# Altium PCB RTC_Breakout_SP24.PcbDoc
Units mil, origin at the board's own origin, x right, y up, seen from the top; angles counter-clockwise.
Board outline 5000 x 6250 mil, 6 copper layers (SIG TOP, GND2, PWR3, SIG4, GND5, SIG BOT), stack 60.566 mil thick; 106 components, 79 nets, 469 pads, 176 vias.
Unrouted connection lines stored in the file: 55.
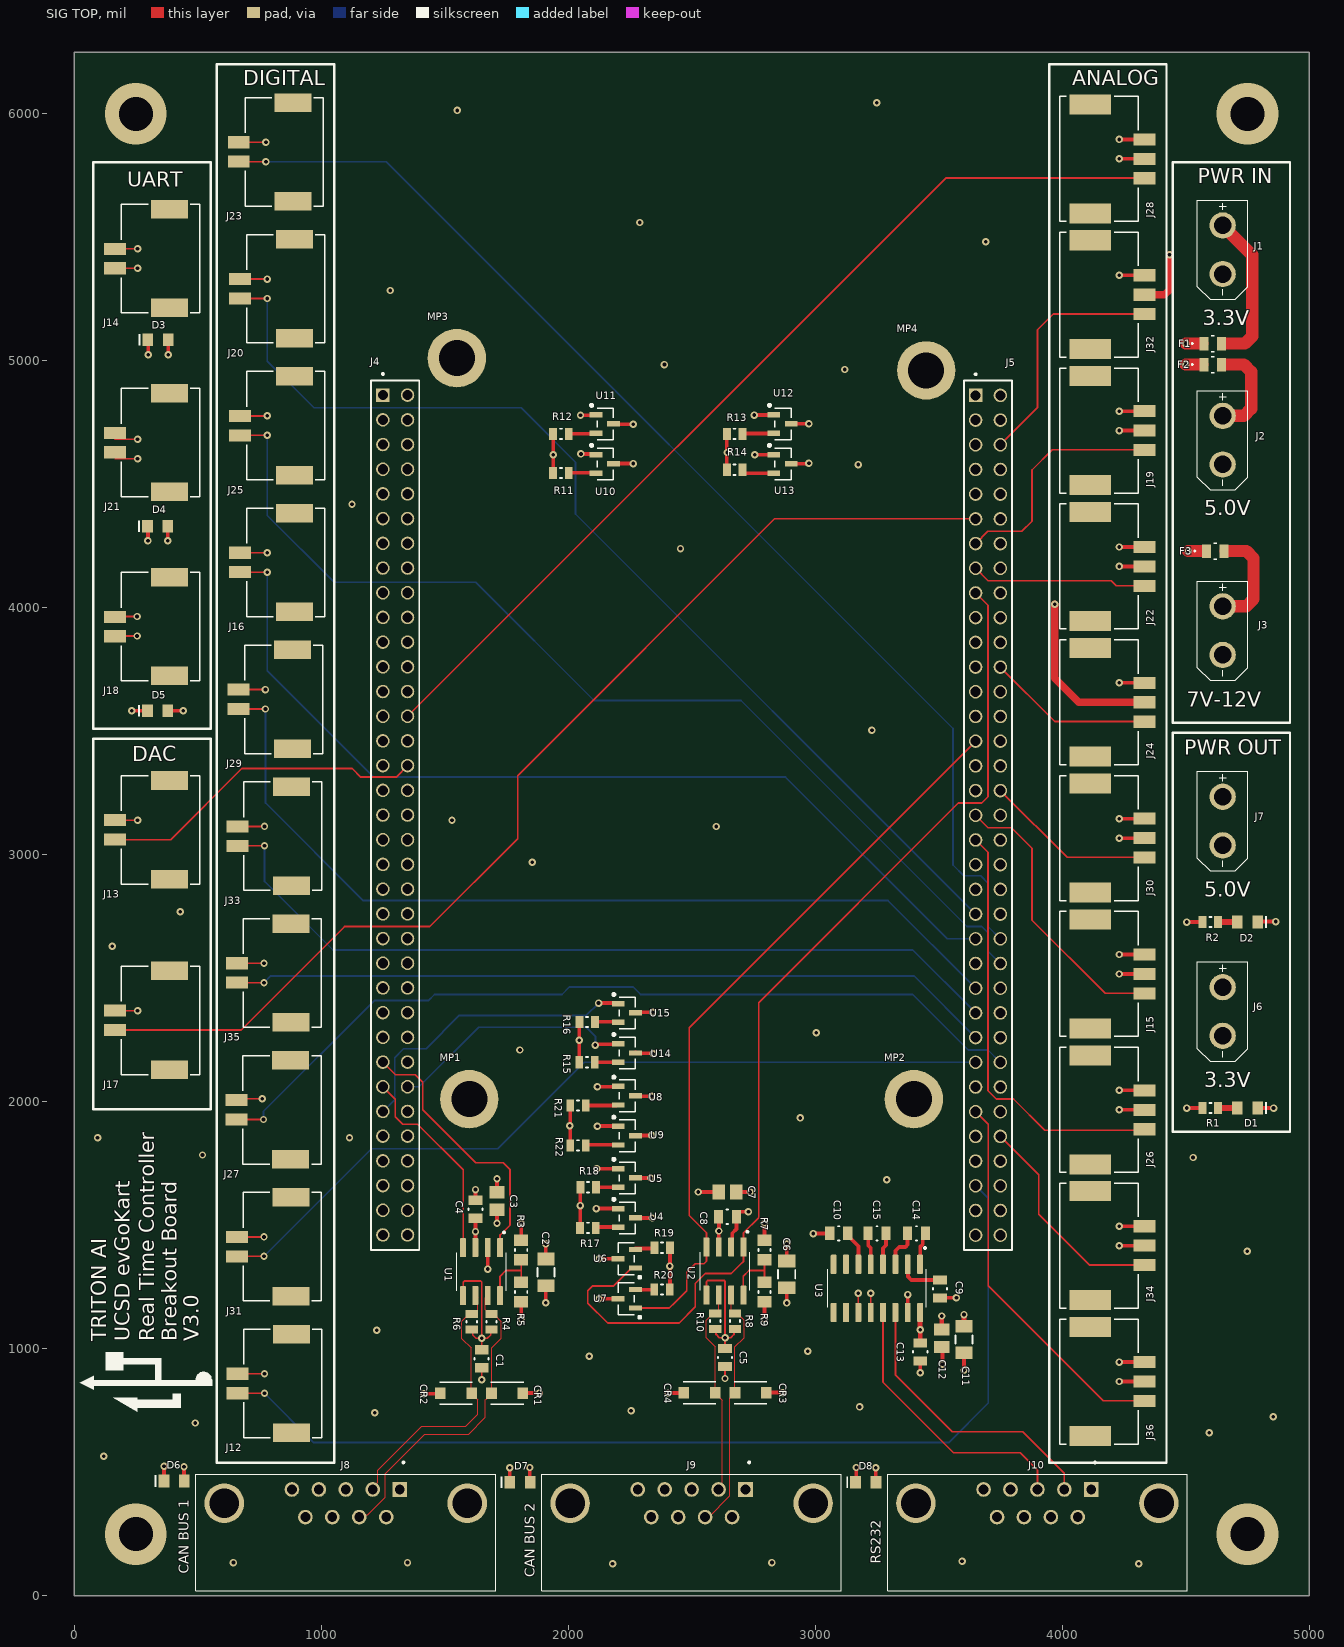
[diagram p0: SIG TOP view]
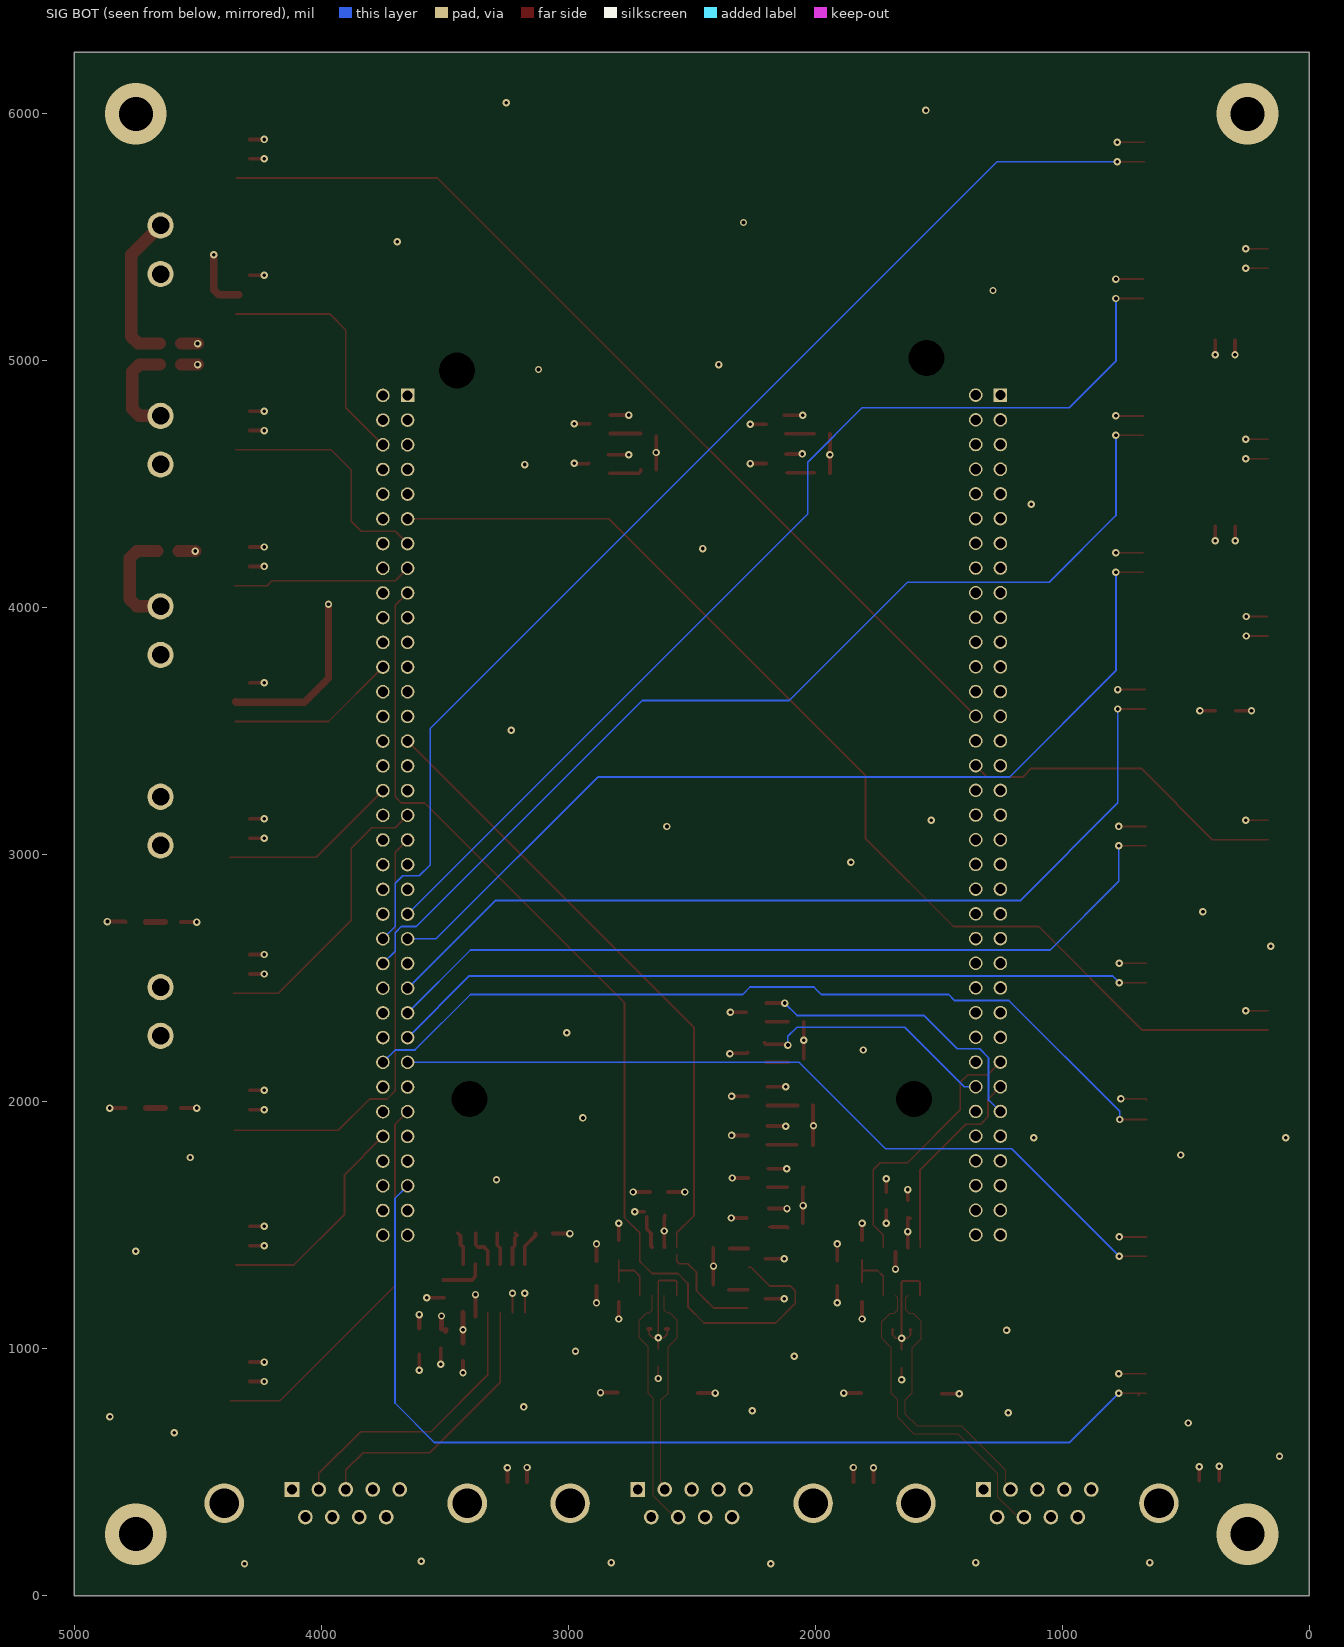
[diagram p1: SIG BOT view, seen from below]
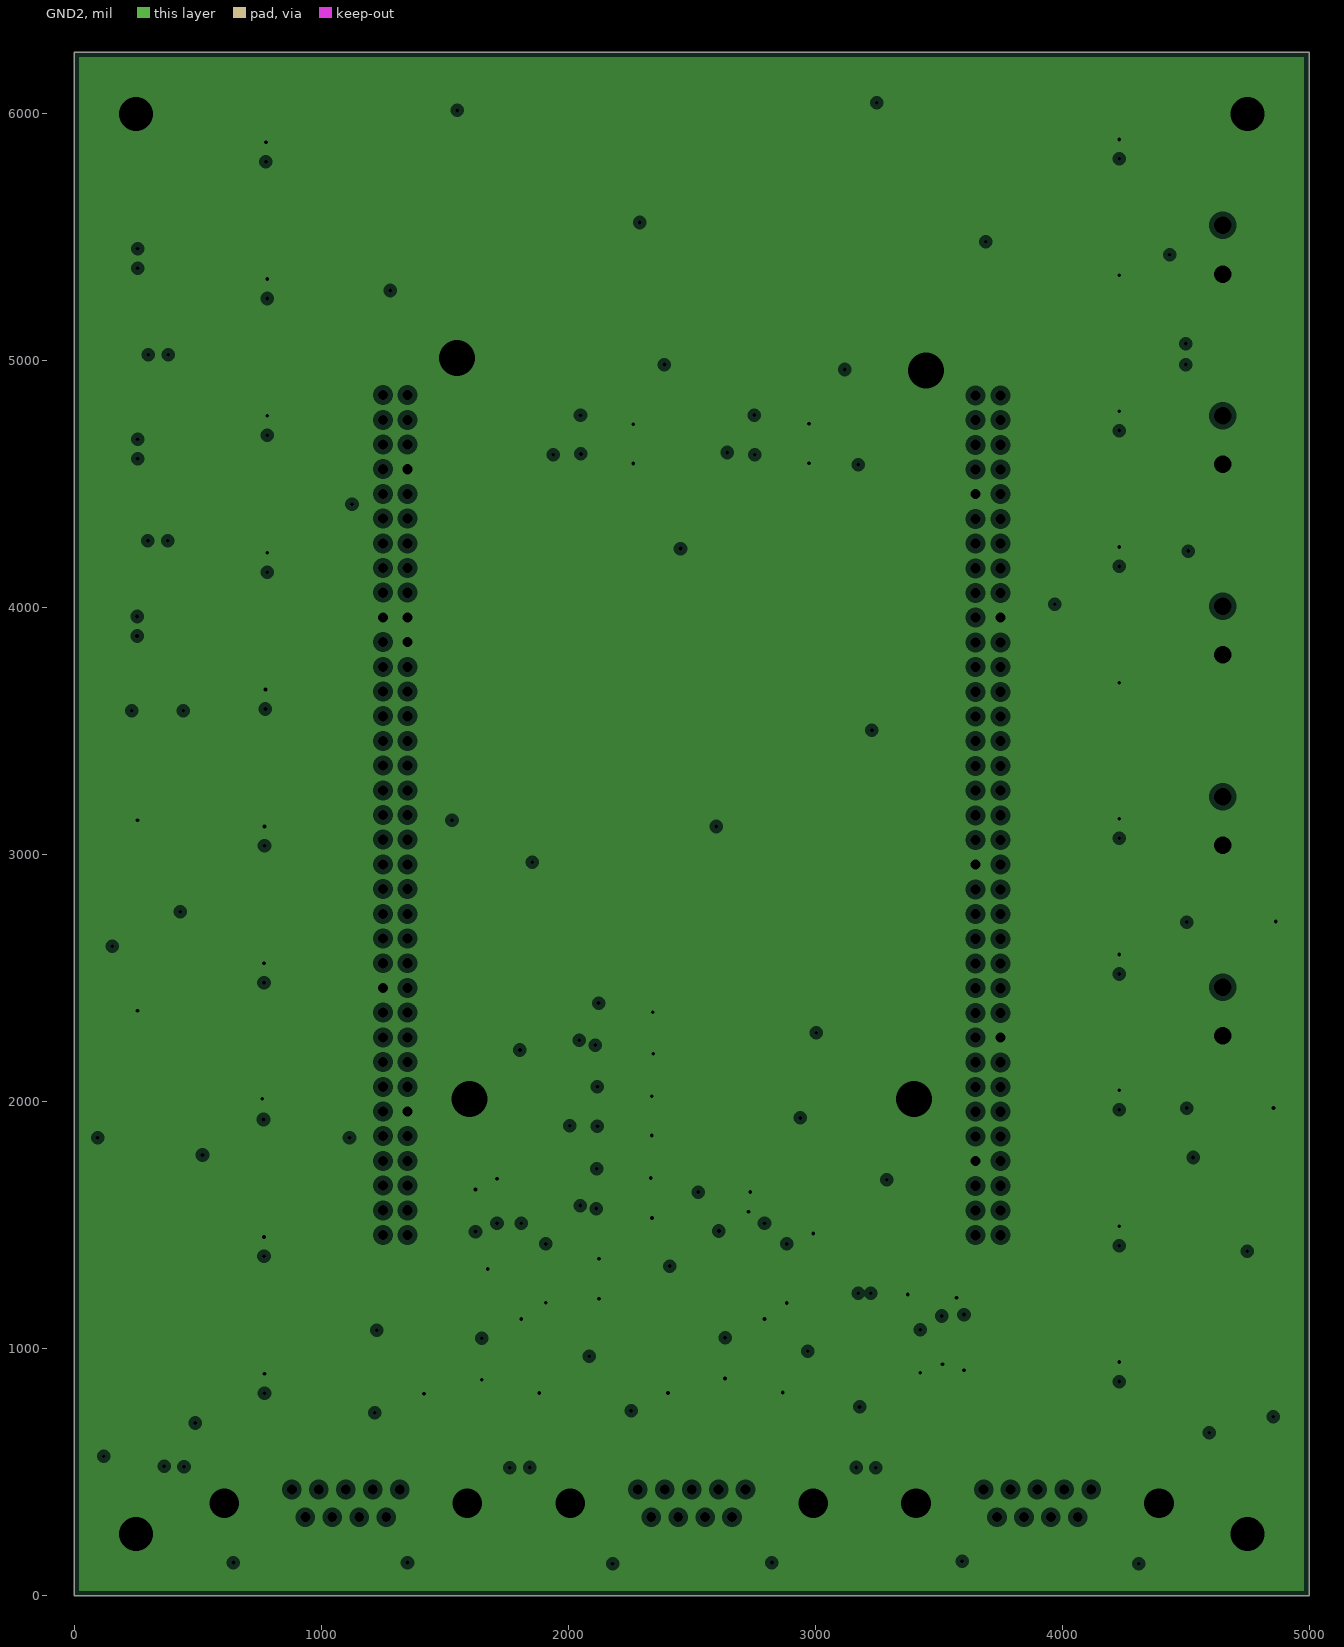
[diagram p2: GND2, clearances drawn from the general rule]
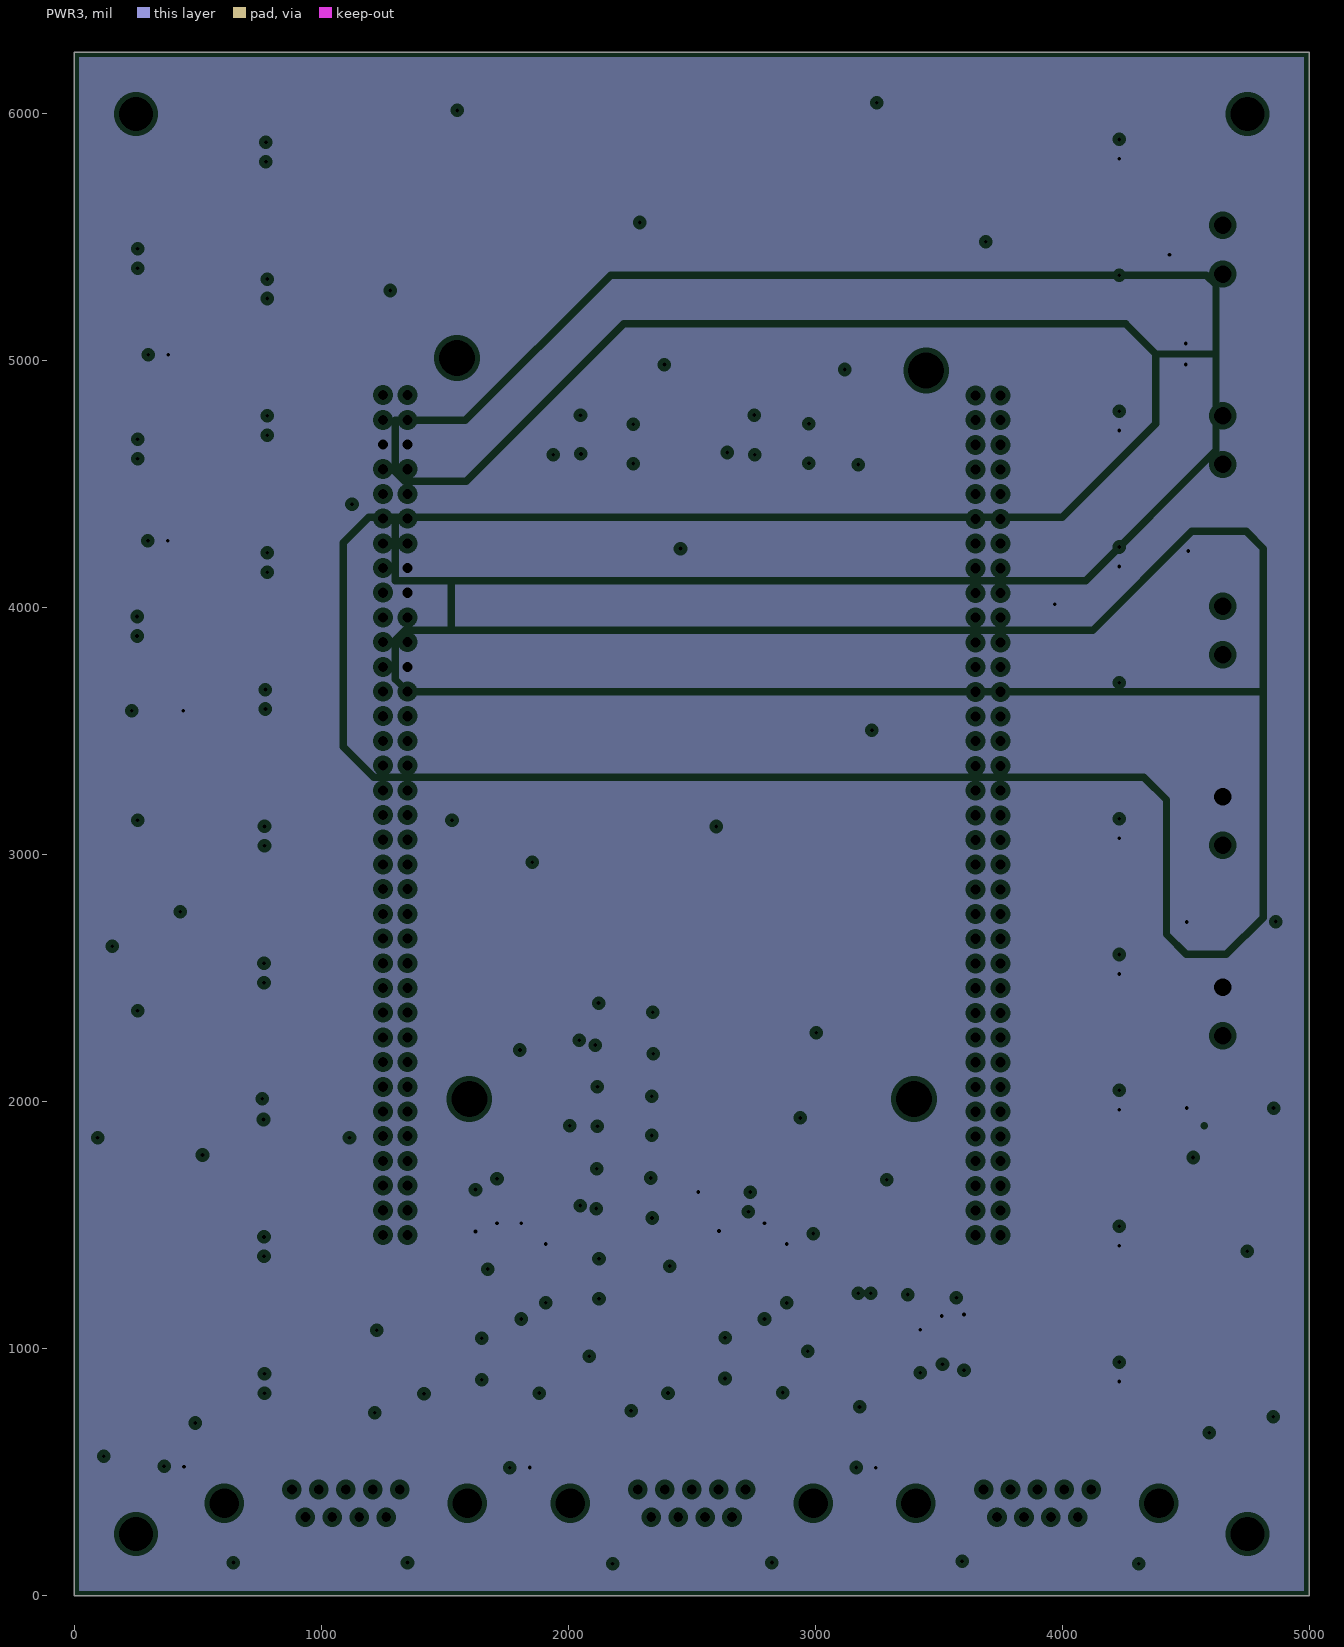
[diagram p3: PWR3, clearances drawn from the general rule]
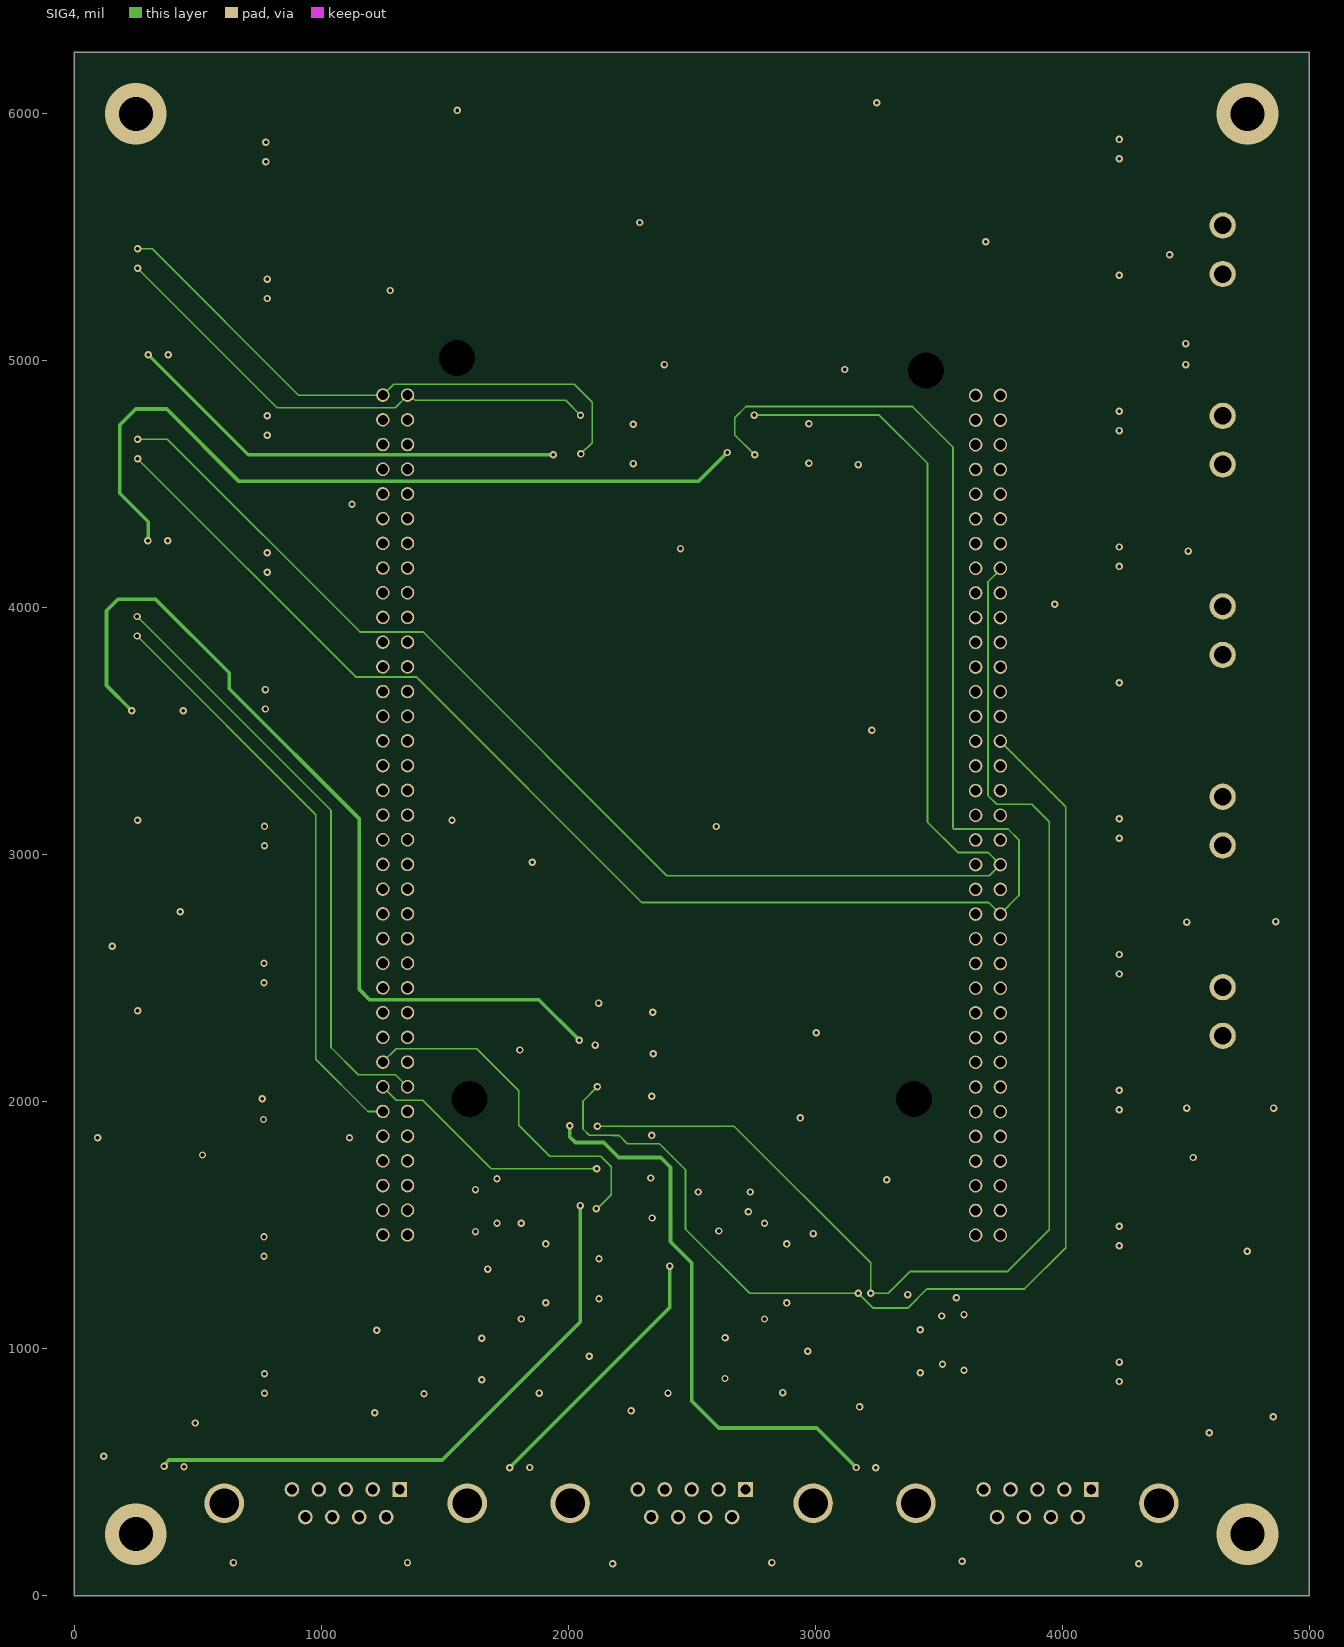
[diagram p4: SIG4]
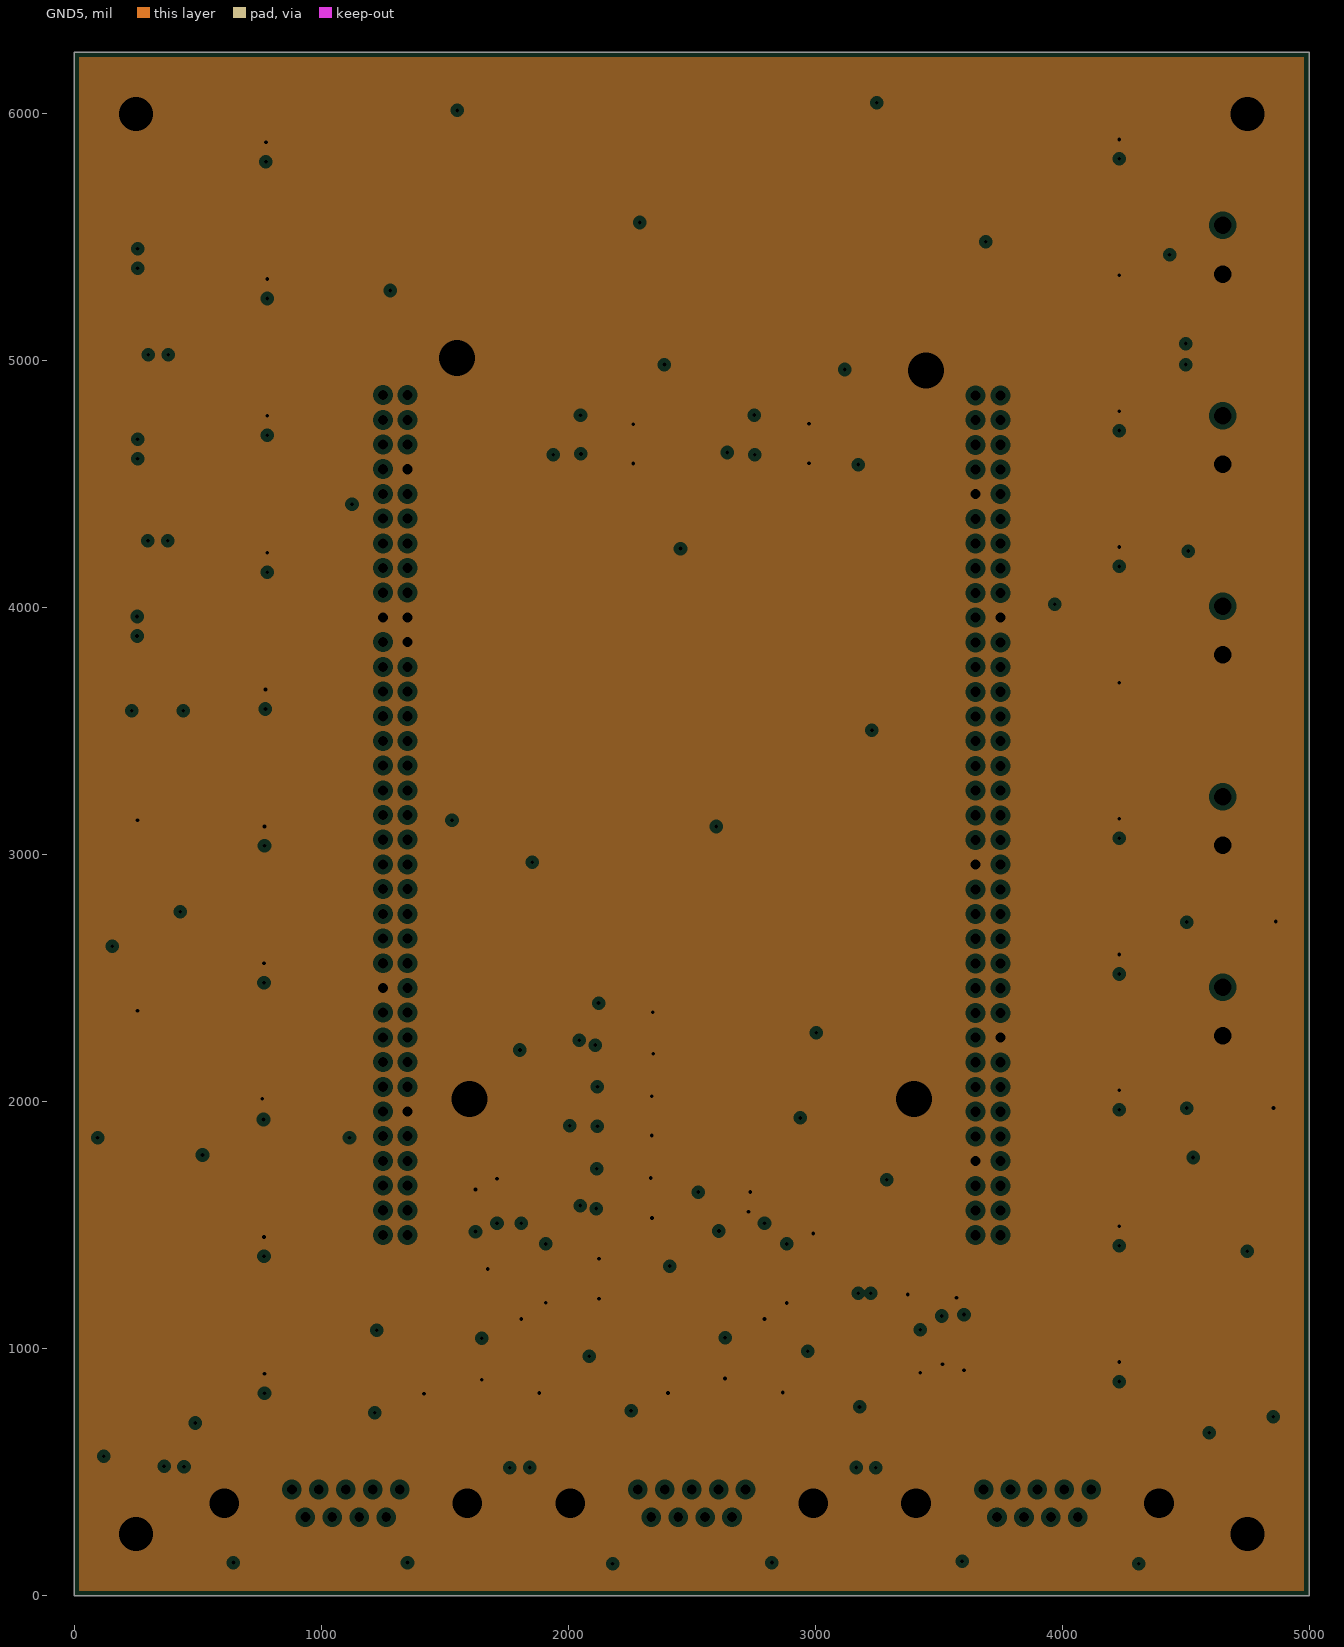
[diagram p5: GND5, clearances drawn from the general rule]
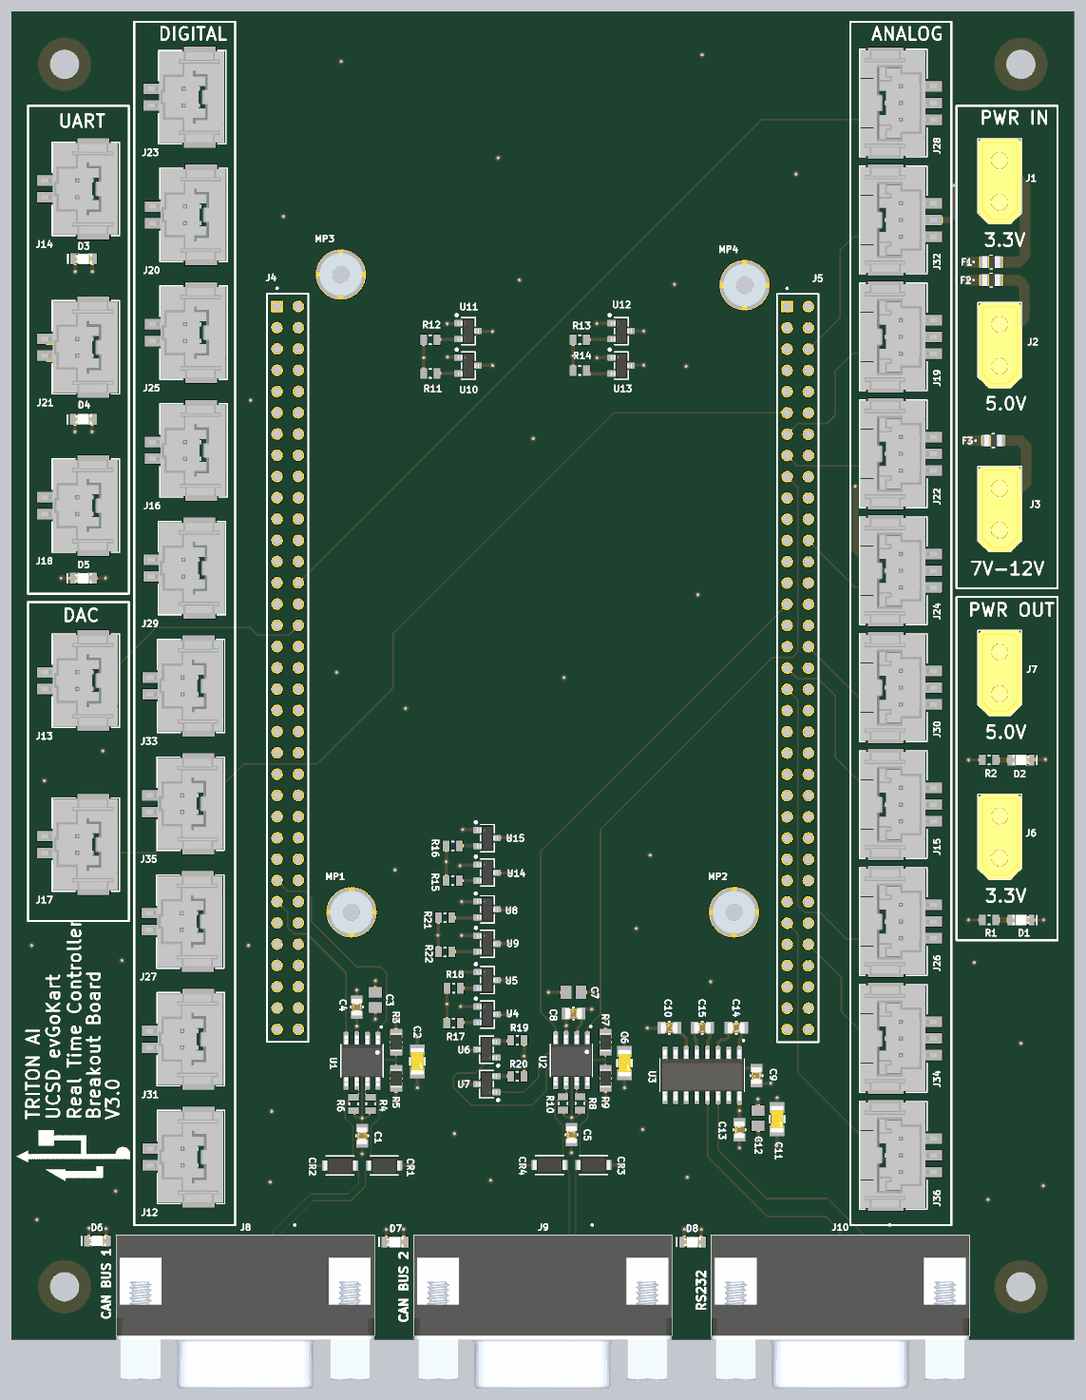
[diagram p6: 3D render of the assembled board from above, using the file's embedded part models]

## Layer stack, top to bottom
Top Solder: solder mask 0.4, Solder Resist, Dk 3.5
SIG TOP: signal copper 1.378
Dielectric 1: prepreg 3.913, PP-006, Dk 4.1
GND2: plane copper 0.598, net GND
Dielectric 2: core 21.654, PP-006, Dk 4.6
PWR3: plane copper 0.598, net (Multiple Nets)
Dielectric 3: dielectric 4.284, FR-4, Dk 4.16
SIG4: signal copper 0.598
Dielectric 4: core 21.654, PP-006, Dk 4.6
GND5: plane copper 0.598, net GND
Dielectric 5: prepreg 3.913, PP-006, Dk 4.1
SIG BOT: signal copper 1.378
Bottom Solder: solder mask 0.4, Solder Resist, Dk 3.5

## Board outline
0,0 0,6250 5000,6250 5000,0

## Design rules (kind name [scope] priority, off if disabled: settings)
BoardOutlineClearance [All] p1: gap=10 ignorepadtopadclearanceinfootprint=FALSE
Clearance [All] p1: gap=5 ignorepadtopadclearanceinfootprint=FALSE
DiffPairsRouting [All] p1: maxlimit=26 minlimit=26 mostfreqgap=26 toplayer_minwidth=5 toplayer_maxwidth=5 toplayer_prefwidth=5 midlayer2_minwidth=5 midlayer2_maxwidth=5 midlayer2_prefwidth=5 bottomlayer_minwidth=5 bottomlayer_maxwidth=5 bottomlayer_prefwidth=5 maxuncoupledlength=500
HoleSize [All] p1: absolutevalues=TRUE maxlimit=250 minlimit=1 maxpercent=80.000 minpercent=20.000
PlaneClearance [All] p1: clearance=20
PlaneConnect [All] p1: planeconnectstyle=Direct reliefexpansion=20 reliefentries=4 reliefconductorwidth=10 reliefairgap=10
PolygonConnect [All] p1: connectstyle=Relief reliefconductorwidth=10 reliefentries=4 polygonreliefangle="90 Angle" airgapwidth=10
RoutingVias [All] p1: holewidth=15 width=50 viastyle="Through Hole" minholewidth=15 minwidth=15 maxholewidth=250 maxwidth=250
SilkToSolderMaskClearance [IsPad] p1: minsilkscreentomaskgap=5 clearancetoexposedcopper=TRUE
SolderMaskExpansion [All] p1: expansion=4 istentingtop=FALSE
SupplyNets "Schematic Supply Nets" [InNet('5V_IO')] p1: voltage=0.000
SupplyNets "Schematic Supply Nets_2" [InNet('3.3V_IO')] p2: voltage=0.000
SupplyNets "Schematic Supply Nets_1" [InNet('GND')] p3: voltage=0.000
Width [All] p1: maxlimit=100 minlimit=6 preferedwidth=7 toplayer_minwidth=7 midlayer2_prefwidth=6 bottomlayer_minwidth=7 impedanceprofiledriven=TRUE impedanceprofileid={4A221AC9-2986-4F59-9D10-05B5BC8C412B} impedanceprofilevalue=50.000000 minimp=50.000000 maximp=50.000000 favimp=50.000000
25 further rules are at their usual default settings.

## Classes and differential pairs
component class "I-O Connectors": D3 D4 D5 J12 J13 J14 J15 J16 J17 J18 J19 J20 J21 J22 J23 J24 J25 J26 J27 J28 J29 J30 J31 J32 J33 J34 J35 J36 R11 R12 R13 R14 R15 R16 U10 U11 U12 U13 U14 U15
component class CAN_RS232: C1 C2 C3 C4 C5 C6 C7 C8 C9 C10 C11 C12 C13 C14 C15 CR1 CR2 CR3 CR4 D6 D7 D8 J8 J9 J10 R3 R4 R5 R6 R7 R8 R9 R10 R17 R18 R19 R20 R21 R22 U1 U2 U3 U4 U5 U6 U7 U8 U9
component class Connectors: D1 D2 F1 F2 F3 J1 J2 J3 J4 J5 J6 J7 MP1 MP2 MP3 MP4 R1 R2
differential pair CAN2: +CAN2_P -CAN2_N
differential pair CAN1: +CAN1_P -CAN1_N

## Components (designator, comment, footprint, x,y, rotation, side; value= is the part's Value field where it differs from the comment)
C1 "4700pF" FP-CC0805-0_85-MFG 1650,960 r270 top value="4.7 nF"
C2 "10uF" FP-CL31-IPC_B 1910,1310 r270 top
C3 "1uF" CAPC2013X100X50ML20T25 1712.17,1599.09 r270 top
C4 "0.1uF" FP-CC0805-0_85-MFG 1625,1565 r90 top value="100 nF"
C5 "4700pF" FP-CC0805-0_85-MFG 2635,965 r270 top value="4.7 nF"
C6 "10uF" FP-CL31-IPC_B 2885,1302.01 r270 top
C7 "1uF" CAPC2013X100X50ML20T25 2645,1635 r180 top
C8 "0.1uF" FP-CC0805-0_85-MFG 2645,1535 r0 top value="100 nF"
C9 "0.1uF" FP-CC0805-0_85-MFG 3505.59,1242.87 r90 top value="100 nF"
C10 "0.1uF" FP-CC0805-0_85-MFG 3095.59,1467.87 r0 top value="100 nF"
C11 "10uF" FP-CL31-IPC_B 3602.63,1038.07 r270 top
C12 "1uF" CAPC2013X100X50ML20T25 3512.63,1043.07 r90 top
C13 "0.1uF" FP-CC0805-0_85-MFG 3425.59,987.87 r270 top value="100 nF"
C14 "0.1uF" FP-CC0805-0_85-MFG 3410.59,1467.87 r180 top value="100 nF"
C15 "0.1uF" FP-CC0805-0_85-MFG 3250.59,1467.87 r180 top value="100 nF"
CR1 "SMF12CA" SOD-123F_LTF 1753.5,820 r180 top
CR2 "SMF12CA" SOD-123F_LTF 1546.5,820 r0 top
CR3 "SMF12CA" SOD-123F_LTF 2738.97,822.2 r0 top
CR4 "SMF12CA" SOD-123F_LTF 2531.97,822.2 r180 top
D1 "150080VS75000" WL-SMCW_0805_150080xx75000 4750,1975 r180 top
D2 "150080VS75000" WL-SMCW_0805_150080xx75000 4750.01,2728 r180 top
D3 "150080VS75000" WL-SMCW_0805_150080xx75000 340,5085 r0 top
D4 "150080VS75000" WL-SMCW_0805_150080xx75000 338.33,4330 r0 top
D5 "150080VS75000" WL-SMCW_0805_150080xx75000 338.32,3583.23 r0 top
D6 "150080VS75000" WL-SMCW_0805_150080xx75000 405,465 r0 top
D7 "150080VS75000" WL-SMCW_0805_150080xx75000 1805,460 r0 top
D8 "150080VS75000" WL-SMCW_0805_150080xx75000 3205,460 r0 top
F1 "500mA" FUS_VISHAY_MFU0805_VIS 4610,5070 r0 top
F2 "1.5A" FUS_VISHAY_MFU0805_VIS 4610,4985 r0 top
F3 "800mA" FUS_VISHAY_MFU0805_VIS 4620,4230 r0 top
J1 "XT30UPB-M" XT30UPB-M 4650,5449.91 r270 top locked
J2 "XT30UPB-M" XT30UPB-M 4650,4678.91 r270 top locked
J3 "XT30UPB-M" XT30UPB-M 4650,3907.91 r270 top locked
J4 "SSW-135-21-G-D" SAMTEC_SSW-135-21-G-D 1249.84,4861.26 r90 top locked
J5 "SSW-135-21-G-D" SAMTEC_SSW-135-21-G-D 3649.84,4860.27 r90 top locked
J6 "XT30UPB-M" XT30UPB-M 4650,2365.92 r270 top
J7 "XT30UPB-M" XT30UPB-M 4650,3136.91 r270 top
J8 "LD09S24A4GV00LF" ASSMANN_A-DF09A/KG-T2S 1100,375 r0 top locked
J9 "LD09S24A4GV00LF" ASSMANN_A-DF09A/KG-T2S 2500,375 r0 top locked
J10 "LD09S24A4GV00LF" ASSMANN_A-DF09A/KG-T2S 3900,375 r0 top locked
J12 "5600200220" CONN_5600200220_MOL 845,860 r90 top
J13 "5600200220" CONN_5600200220_MOL 350,3101.09 r90 top
J14 "5600200220" CONN_5600200220_MOL 350,5414.08 r90 top
J15 "5600200320" CONN03_560020_MOL 4149.61,2517.82 r270 top
J16 "5600200220" CONN_5600200220_MOL 856.54,4183.87 r90 top
J17 "5600200220" CONN_5600200220_MOL 350,2330.09 r90 top
J18 "5600200220" CONN_5600200220_MOL 350,3924.26 r90 top locked
J19 "5600200320" CONN03_560020_MOL 4149.61,4717.82 r270 top
J20 "5600200220" CONN_5600200220_MOL 856.54,5291.82 r90 top locked
J21 "5600200220" CONN_5600200220_MOL 350,4669.17 r90 top
J22 "5600200320" CONN03_560020_MOL 4149.61,4167.82 r270 top
J23 "5600200220" CONN_5600200220_MOL 850.77,5845.8 r90 top
J24 "5600200320" CONN03_560020_MOL 4149.61,3617.82 r270 top
J25 "5600200220" CONN_5600200220_MOL 856.54,4737.84 r90 top
J26 "5600200320" CONN03_560020_MOL 4149.61,1967.82 r270 top
J27 "5600200220" CONN_5600200220_MOL 841.15,1967.96 r90 top
J28 "5600200320" CONN03_560020_MOL 4149.61,5817.82 r270 top
J29 "5600200220" CONN_5600200220_MOL 848.85,3629.89 r90 top
J30 "5600200320" CONN03_560020_MOL 4149.61,3067.82 r270 top
J31 "5600200220" CONN_5600200220_MOL 843.08,1413.98 r90 top
J32 "5600200320" CONN03_560020_MOL 4149.61,5267.82 r270 top
J33 "5600200220" CONN_5600200220_MOL 845,3075.91 r90 top locked
J34 "5600200320" CONN03_560020_MOL 4149.61,1417.82 r270 top
J35 "5600200220" CONN_5600200220_MOL 843.08,2521.93 r90 top locked
J36 "5600200320" CONN03_560020_MOL 4149.61,867.82 r270 top
MP1 "M2.5 x 9mm" 9774090151 1599.84,2011.26 r0 top locked
MP2 "M2.5 x 9mm" 9774090151 3399.84,2011.26 r0 top locked
MP3 "M2.5 x 9mm" 9774090151 1549.84,5011.26 r0 top locked
MP4 "M2.5 x 9mm" 9774090151 3449.84,4961.26 r0 top locked
R1 "64.9" RESC2013X60X35LL10T20 4600,1975 r180 top
R2 "64.9" RESC2013X60X35LL10T20 4600.01,2728 r180 top
R3 "1k" RESC2013X60X35ML10T20 1810,1400 r90 top
R4 "60.4" RESC2013X60X35LL10T20 1690,1110 r90 top
R5 "1k" RESC2013X60X35ML10T20 1810,1230 r90 top
R6 "60.4" RESC2013X60X35LL10T20 1610,1110 r270 top
R7 "1k" RESC2013X60X35ML10T20 2795,1400 r90 top
R8 "60.4" RESC2013X60X35LL10T20 2675.47,1112.2 r90 top
R9 "1k" RESC2013X60X35ML10T20 2795,1230 r90 top
R10 "60.4" RESC2013X60X35LL10T20 2595.47,1112.2 r270 top
R11 "64.9" RESC2013X60X35LL10T20 1970.79,4545.79 r0 top
R12 "64.9" RESC2013X60X35LL10T20 1970.79,4704.42 r0 top
R13 "64.9" RESC2013X60X35LL10T20 2674.22,4704.42 r0 top
R14 "64.9" RESC2013X60X35LL10T20 2674.22,4559.42 r0 top
R15 "64.9" RESC2013X60X35LL10T20 2076.51,2160.27 r0 top
R16 "64.9" RESC2013X60X35LL10T20 2077.17,2323.35 r0 top
R17 "64.9" RESC2013X60X35LL10T20 2080,1490 r0 top
R18 "64.9" RESC2013X60X35LL10T20 2081.09,1654.14 r0 top
R19 "64.9" RESC2013X60X35LL10T20 2380.65,1409.37 r180 top
R20 "64.9" RESC2013X60X35LL10T20 2380,1240 r180 top
R21 "64.9" RESC2013X60X35LL10T20 2040,1985.53 r0 top
R22 "64.9" RESC2013X60X35LL10T20 2040,1824.03 r0 top
U1 "SN65HVD230DR" SOIC127P599X175-8N 1649.53,1312.8 r270 top
U2 "SN65HVD230DR" SOIC127P599X175-8N 2635,1315 r270 top
U3 "MAX3232ECDR" SOIC127P600X175-16N 3250,1245 r270 top
U4 "BC859C,215" SOT23_NEX 2240,1530.5 r270 top
U5 "BC859C,215" SOT23_NEX 2240,1692.5 r270 top
U6 "BC859C,215" SOT23_NEX 2235,1365 r90 top
U7 "BC859C,215" SOT23_NEX 2235,1203 r90 top
U8 "BC859C,215" SOT23_NEX 2240,2025 r270 top
U9 "BC859C,215" SOT23_NEX 2240,1863 r270 top
U10 "BC859C,215" SOT23_NEX 2150,4583 r270 top
U11 "BC859C,215" SOT23_NEX 2150,4745 r270 top
U12 "BC859C,215" SOT23_NEX 2870,4745 r270 top
U13 "BC859C,215" SOT23_NEX 2870,4583 r270 top
U14 "BC859C,215" SOT23_NEX 2240,2198 r270 top
U15 "BC859C,215" SOT23_NEX 2240,2360 r270 top

## Footprints (in the part's own frame and the unit in brackets; to place one, negate y for a bottom-side part, rotate by r counter-clockwise, add the part's x,y. Pads: shape width x height; smd on the part's side, far side on the other; paste and mask are expansions set on the pad)
9774090151 [mm] "SMT Steel Spacer with internal Thread M2.5, height 9mm"
  round 6 / inner round 0 / far side round 0 hole 3.7: 1(0,0)
  body extent -2.55,-2.55 2.55,2.55, height 9
ASSMANN_A-DF09A/KG-T2S [mm]
  rect 1.508x1.508 hole 1: 1(5.54,1.42)
  round 1.508 hole 1: 2(2.77,1.42) 3(0,1.42) 4(-2.77,1.42) 5(-5.54,1.42) 6(4.155,-1.42) 7(1.385,-1.42) 8(-1.385,-1.42) 9(-4.155,-1.42)
  round 4.066 hole 3.05: SHIELD(-12.495,0) SHIELD(12.495,0)
  silkscreen extent -15.41,-9.02 15.41,4.3, body extent -15.41,-15.32 15.41,2.98, height 12.55
CAPC2013X100X50ML20T25 [mm] "Chip Capacitor, 2-Leads, Body 2.00x1.25mm, IPC Low Density"
  rect 1.27x1.55 smd: 1(-0.9,0) 2(0.9,0)
  body extent -1.1,-0.72 1.1,0.72, height 1
CONN03_560020_MOL [mil]
  rect 49x89 smd: 1(78.74,184.21) 2(0,184.21) 3(-78.74,184.21)
  rect 81x167 smd: 4(-220.47,-35.48) 5(220.47,-35.48)
  silkscreen extent -253,-158 253,159, body extent -248,-156 248,204, height 315
CONN_5600200220_MOL [mil]
  rect 49x89 smd: 1(-39.37,184.21) 2(39.37,184.21)
  rect 75x150 smd: 3(-200,-35.48) 4(200,-35.48)
  silkscreen extent -220,-158 220,158, body extent -215,-151 215,209, height 315
FP-CC0805-0_85-MFG [mm]
  rect 0.95x1.4 smd paste+0 mask+0: 1(-0.925,0) 2(0.925,0)
  silkscreen extent -0.08,-0.72 0.08,0.72, body extent -1.6,-1.05 1.6,1.05, height 0.25
FP-CL31-IPC_B [mil]
  rect 51.4x69.22 smd paste+0 mask+0: 1(-54.19,0) 2(54.19,0)
  silkscreen extent -17,-35 17,35, body extent -90,-44 90,44, height 10
FUS_VISHAY_MFU0805_VIS [mil]
  rect 35.5x55 smd: 1(-35.25,0) 2(35.25,0)
  silkscreen extent -86,-32 5,32, body extent -41,-28 41,28, height 22
RESC2013X60X35LL10T20 [mm] "Chip Resistor, 2-Leads, Body 2.00x1.25mm, IPC High Density"
  rect 0.8x1.25 smd: 1(-0.8,0) 2(0.8,0)
  silkscreen extent -0.1,-0.53 0.1,0.53, body extent -1.05,-0.67 1.05,0.67, height 0.6
RESC2013X60X35ML10T20 [mm] "Chip Resistor, 2-Leads, Body 2.1x1.35mm, IPC Low Density"
  rect 1.2x1.45 smd: 1(-1,0) 2(1,0)
  silkscreen extent -0.1,-0.63 0.1,0.63, body extent -1.05,-0.68 1.05,0.67, height 0.6
SAMTEC_SSW-135-21-G-D [mm]
  rect 1.39x1.39 / inner round 1.39 / far side rect 1.39x1.39 hole 1.04: 01(0,0)
  round 1.39 hole 1.04: 02(0,-2.54) 03(-2.54,0) 04(-2.54,-2.54) 05(-5.08,0) 06(-5.08,-2.54) 07(-7.62,0) 08(-7.62,-2.54) 09(-10.16,0) 10(-10.16,-2.54) 11(-12.7,0) 12(-12.7,-2.54) 13(-15.24,0) 14(-15.24,-2.54) 15(-17.78,0) 16(-17.78,-2.54) 17(-20.32,0) 18(-20.32,-2.54) 19(-22.86,0) 20(-22.86,-2.54) 21(-25.4,0) 22(-25.4,-2.54) 23(-27.94,0) 24(-27.94,-2.54) 25(-30.48,0) 26(-30.48,-2.54) 27(-33.02,0) 28(-33.02,-2.54) 29(-35.56,0) 30(-35.56,-2.54) 31(-38.1,0) 32(-38.1,-2.54) 33(-40.64,0) 34(-40.64,-2.54) 35(-43.18,0) 36(-43.18,-2.54) 37(-45.72,0) 38(-45.72,-2.54) 39(-48.26,0) 40(-48.26,-2.54) 41(-50.8,0) 42(-50.8,-2.54) 43(-53.34,0) 44(-53.34,-2.54) 45(-55.88,0) 46(-55.88,-2.54) 47(-58.42,0) 48(-58.42,-2.54) 49(-60.96,0) 50(-60.96,-2.54) 51(-63.5,0) 52(-63.5,-2.54) 53(-66.04,0) 54(-66.04,-2.54) 55(-68.58,0) 56(-68.58,-2.54) 57(-71.12,0) 58(-71.12,-2.54) 59(-73.66,0) 60(-73.66,-2.54) 61(-76.2,0) 62(-76.2,-2.54) 63(-78.74,0) 64(-78.74,-2.54) 65(-81.28,0) 66(-81.28,-2.54) 67(-83.82,0) 68(-83.82,-2.54) 69(-86.36,0) 70(-86.36,-2.54)
  silkscreen extent -87.89,-3.75 2.27,1.21
SOD-123F_LTF [mil]
  rect 43x47 smd paste+0 mask+0: 1(-63.5,0) 2(63.5,0)
  silkscreen extent -66,-45 66,45, body extent -77,-39 77,39, height 43
SOIC127P599X175-8N [mm]
  rrect25% 1.97x0.6 smd: 1(-2.47,1.905) 2(-2.47,0.635) 3(-2.47,-0.635) 4(-2.47,-1.905) 5(2.47,-1.905) 6(2.47,-0.635) 7(2.47,0.635) 8(2.47,1.905)
  silkscreen extent -4.14,-2.52 1.95,2.52, body extent -3,-2.45 3,2.45, height 1.75
SOIC127P600X175-16N [mm]
  rrect25% 1.97x0.6 smd: 1(-2.475,4.445) 2(-2.475,3.175) 3(-2.475,1.905) 4(-2.475,0.635) 5(-2.475,-0.635) 6(-2.475,-1.905) 7(-2.475,-3.175) 8(-2.475,-4.445) 9(2.475,-4.445) 10(2.475,-3.175) 11(2.475,-1.905) 12(2.475,-0.635) 13(2.475,0.635) 14(2.475,1.905) 15(2.475,3.175) 16(2.475,4.445)
  silkscreen extent -4.24,-5.06 1.95,5.06, body extent -3.01,-4.95 3.01,4.95, height 1.75
SOT23_NEX [mil]
  rect 22x52 smd paste+3.86 mask+4: 1(-37.5,-37.21) 2(37.5,-37.21) 3(0,33.36)
  silkscreen extent -80,-60 64,33, body extent -59,-49 59,49, height 43
WL-SMCW_0805_150080xx75000 [mm] "SMD Mono-color Chip LED, body 2.0x1.25mm"
  rect 1.1x1.3 smd: 1(-1.05,0) 2(1.05,0)
  silkscreen extent -2,-0.6 -1.8,0.6, body extent -1,-0.63 1,0.62, height 0.7
XT30UPB-M [mm]
  round 2.7 hole 1.8: 1(-2.5,0) 2(2.5,0)
  silkscreen extent -5.1,-2.6 5.1,2.6, body extent -5.1,-2.6 5.1,2.6, height 10.71

## Part data
C1 C5: library part CMP-1036-03591-2, "CAP CER 4700PF 50V X7R 0805", Capacitance="4.7 nF", Manufacturer=Yageo, Manufacturer Part Number=CC0805KRX7R9BB472, Package=CC0805-0.85, Temperature="-30°C to +85°C", Temperature Characteristic=X7R, Temperature Range High=+85°C, Temperature Range Low=-30°C, Tolerance=0.1, Voltage Rating="50 V", Automotive=No, Category=Cap, ComponentLink2Description=Datasheet, ComponentLink2URL=http://www.yageo.com/documents/recent/UPY-GPHC_Y5V_6.3V-to-50V_8.pdf, Device Class L1="Passive Components", Device Class L2=Capacitors, Device Class L3="Ceramic Capacitors", Digikey Description="CAP CER 4700PF 50V X7R 0805", Footprint Url=http://www.yageo.com/exep/pages/download/literatures/UPY-C_GEN_24.pdf, Height=0.95mm, Ipc Land Pattern Name=CAPC200125X85, Lead Free=Yes, Material=Ceramic, Mouser Description="Multilayer Ceramic Capacitors MLCC - SMD/SMT 4.7nF 50V X7R 10%", Octopart=https://octopart.com/cc0805krx7r9bb472-yageo-192986, RoHS=TRUE
C2 C6 C11: library part CMP-13271-001434-1, "Cap Ceramic 10uF 25V X7R ±10% SMD 1206 +125°C Embossed T/R", Case Code (Imperial)=1206, Case Code (Metric)=3216, Dielectric=X7R, Max Operating Temperature=125°C, Min Operating Temperature=-55°C, Package Quantity=1, Tolerance=10%, Voltage Rating=25V, Case/Package=1206, Contact Plating=Tin, Depth=1.6mm, Height=1.6mm, Length=0.126inch, Mount="Surface Mount", Packaging="Tape and Reel", Radiation Hardening=No, Thickness=0.071inch, Width=0.063inch
C3: library part CMP-2007-03676-1, "C0805C105K8RACTU", Manufacturer=Kemet, Part Number=C0805C105K8RACTU
C4 C8 C9 C10 C13 C14 C15: library part CMP-2100-03606-3, "CAP CER 0.1UF 50V X7R 0805", Capacitance="100 nF", Manufacturer=Yageo, Manufacturer Part Number=CC0805KRX7R9BB104, Package=CC0805-0.85, Temperature="-30°C to +85°C", Temperature Characteristic=X7R, Temperature Range High=+85°C, Temperature Range Low=-30°C, Tolerance=0.1, Voltage Rating="50 V", Automotive=No, Category=Cap, ComponentLink2Description=Datasheet, ComponentLink2URL=http://www.yageo.com/documents/recent/UPY-GPHC_Y5V_6.3V-to-50V_8.pdf, Device Class L1="Passive Components", Device Class L2=Capacitors, Device Class L3="Ceramic Capacitors", Digikey Description="CAP CER 0.1UF 50V X7R 0805", Footprint Url=http://www.yageo.com/exep/pages/download/literatures/UPY-C_GEN_24.pdf, Height=0.95mm, Ipc Land Pattern Name=CAPC200125X85, Lead Free=Yes, Material=Ceramic, Mouser Description="Multilayer Ceramic Capacitors MLCC - SMD/SMT 100nF 50V X7R 10%", Octopart=https://octopart.com/cc0805krx7r9bb104-yageo-192993, RoHS=TRUE
C7 C12: library part CMP-2007-03676-1, Manufacturer=Kemet, Part Number=C0805C105K8RACTU
CR1 CR2 CR3 CR4: "No Description Available", Mfr_Name="Littelfuse Inc"
D1 D2 D3 D4 D5 D6 D7 D8: library part CMP-1426-00009-6, "WL-SMCW SMT Mono-Color Chip LED Waterclear", Case Code (Imperial)=0805, Case Code (Metric)=2012, Color=Green, Forward Current=100mA, Forward Voltage=2V, Max Junction Temperature (Tj)=95°C, Max Operating Temperature=85°C, Max Reverse Voltage (DC)=5V, Min Operating Temperature=-40°C, Power Dissipation=72mW, Test Current=20mA, Case/Package=0805, Dominant Wavelength=570nm, Height=700µm, Length=2mm, Lens Style="Clear, Rectangular", Luminous Intensity=40mcd, Mount="Surface Mount", Packaging="Tape and Reel", Peak Wavelength=572nm, REACH SVHC=Unknown, Reverse Voltage=5V, RoHS=Compliant, Viewing Angle=140°, Wavelength=570nm, Width=1.25mm
F1: library part MFU0805FF00500P500, "MFU0805FF00500P500", Mfr_Name=Vishay, Current Rating=500mA
F2: library part MFU0805FF01500P100, "MFU0805FF01500P100", Mfr_Name=Vishay, Current Rating=1.5A
F3: library part MFU0805FF00800P100, "MFU0805FF00800P100", Mfr_Name=Vishay, Current Rating=800mA
J1 J2 J3 J6 J7: "Socket; DC supply; XT30; male; PIN: 2; on PCBs; THT; yellow; 15A; 500V", Package=None, Availability="Not in stock", Check_prices=https://www.snapeda.com/parts/XT30UPB-M/AMASS/view-part/?ref=eda, MF=amass, MP=XT30UPB-M, Price=None, SnapEDA_Link=https://www.snapeda.com/parts/XT30UPB-M/AMASS/view-part/?ref=snap
J4 J5: Package=None, Availability=Unavailable, MF="{'manufacturer': u'Samtec Inc.'}", MP=SSW-135-21-G-D, Price=None
J8 J9 J10: "No Description Available", Mfr_Name="Amphenol ICC", RefDes=RefDes, Type="D-Sub Connector Assemblies"
J12 J13 J14 J15 J16 J17 J18 J19 J20 J21 J22 J23 J24 J25 J26 J27 J28 J29 J30 J31 J32 J33 J34 J35 J36: "No Description Available", Mfr_Name="Molex Connector Corporation", RefDes=RefDes, Type=Type
MP1 MP2 MP3 MP4: library part 9774090151R, "WA-SMSI SMT Steel Spacer with internal Thread, OD 5.1mm, M2.5 x 9mm", Manufacturer="Wurth Elektronik", Operating Temperature Max=150°C, Operating Temperature Min=-55°C, Category="SMT Spacers", ComponentLink1Description="Website Link", ComponentLink1URL=https://www.we-online.com/redexpert/article/9774090151R?ad, ComponentLink2Description="Datasheet Link", ComponentLink2URL=https://www.we-online.com/redexpert/spec/9774090151R?ad, Height=9mm, Inside Diameter=3.5mm, Manufacturer Part Number=9774090151R, Match Code=WA-SMSI, Material=Steel, Mount="Surface Mount", Outside Diameter=5.1mm, Packaging="Tape and Reel", Surface=Tin, Thread Size=M2.5
R1 R2 R11 R12 R13 R14 R15 R16 R17 R18 R19 R20 R21 R22: library part CMP-2001-01223-1, Manufacturer=Yageo, Part Number=RC0805FR-0764R9L
R3 R5 R7 R9: library part CMP-2100-03671-1, "Chip Resistor, 1 KOhm, +/- 1%, 125 mW, -55 to 155 degC, 0805 (2012 Metric), RoHS, Tape and Reel", Case Code (Imperial)=0805, Case Code (Metric)=2012, Manufacturer=Yageo, Max Operating Temperature=155degC, Max Power Dissipation=125mW, Min Operating Temperature=-55degC, Package Description="2-Pin Surface Mounted Device, Body 2 x 1.25 mm", Package Quantity=1, Resistance=1KOhm, Temperature Coefficient=100ppm/degreesC, Tolerance=1%, Voltage Rating=150V, Case/Package=0805, Composition=ThickFilm, Datasheet URL=http://www.yageo.com/NewPortal/yageodocoutput?fileName=/pdf/R-Chip/PYu-RC_Group_51_RoHS_L_5.pdf, Datasheet Version="Rev. 5, 10/2016", Depth=1.25mm, Height=0.024inch, Lead Free=LeadFree, Length=0.079inch, Manufacturer URL=http://www.yageo.com/, Military Standard=Not, Number of Pins=2, Number of Terminations=2, Package Reference=0805, Packaging=TapeandReel, Power Rating=125mW, REACH SVHC=Unknown, RoHSCompliant=true, Termination=SMD/SMT, Voltage Rating (DC)=150V, Width=0.049inch
R4 R6 R8 R10: library part CMP-2001-01223-1, Manufacturer=Yageo, Part Number=RC0805FR-0760R4L
U1 U2: "3.3 V CAN Transceiver with Standby Mode 8-SOIC -40 to 85", Package="SOIC-8 Texas Instruments", Arrow_Electronics-Purchase-URL=https://snapeda.com/shop?store=Arrow+Electronics&id=51767, Availability=Good, DigiKey-Purchase-URL=https://snapeda.com/shop?store=DigiKey&id=51767, MF="Texas Instruments", Mouser-Purchase-URL=https://snapeda.com/shop?store=Mouser&id=51767, MP=SN65HVD230DR, Price=None, SnapEDA_Link=https://www.snapeda.com/parts/SN65HVD230DR/Texas%20Instruments/view-part/51767/?ref=snap, Texas_Instruments-Purchase-URL=https://snapeda.com/shop?store=Texas+Instruments&id=51767
U3: "3-V to 5.5-V multichannel RS-232 line driver and receiver with 15-kV IEC ESD protection 16-SOIC 0 to 70", Package=None, Availability=Unavailable, MP=MAX3232ECDR, Price=None
U4 U5 U6 U7 U8 U9 U10 U11 U12 U13 U14 U15: "No Description Available", Mfr_Name=Nexperia

## Via types
v1: diameter 30, hole 15, SIG TOP to SIG BOT, tented both sides, 172 vias
v2: diameter 250, hole 137.8, SIG TOP to SIG BOT, 4 vias

## Nets (pads, with @x,y where several pads share a name; then routed paths per layer and width w, separated by ;. In a path a pad name is that pad's centre, name@x,y a point inside that pad or via, vN(x,y) a via of type N, cw(c..) or ccw(c..) an arc to the next point about the centre after c; other vN are vias at no path point)
3.3V_IO: C2.1 C3.2 C4.1 C6.1 C7.2 C8.1 C11.1 C12.2 C13.1 D3.2 D4.2 D5.2 D6.2 D7.2 D8.2 J4.05 J6.1 J15.2 J19.2 J22.2 J24.2 J26.2 J28.2 J30.2 J32.2 J34.2 J36.2 R1.2 R3.2 R7.2 U1.3 U2.3 U3.16 | length 2771.6
  SIG TOP w7: D4.2@375.73,4330 D4.2 ; D5.2@377.69,3583.23 D5.2 ; D6.2@445,466.34 D6.2 ; D7.2@1845,461.34 D7.2
  SIG TOP w15: D5.2 v1(442.25,3583.23) ; v1(379.67,4271.34) D4.2 ; v1(380.71,5024.99) D3.2@380.71,5083.66 ; D6.2@445,466.34 v1(445,522.5) ; C4.1@1616.14,1528.58 C4.1 ; C4.1@1623.58,1530 C4.1 ; U1.3 1624.76,1410.28 1624.76,1474.76 v1(1625,1475) C4.1 ; v1(1712.17,1509.09) C3.2 ; R3.2 v1(1810,1508.94) ; D7.2@1845,461.34 v1(1845,520) ; C2.1@1910,1356.31 C2.1 v1(1910,1425) ; v1(2527.13,1635) C7.2@2596.69,1635 ; C8.1@2609.06,1541.06 2609.06,1532.2 2610.47,1530.78 v1(2610.47,1477.2) 2610.24,1476.96 2610.24,1412.48 U2.3 ; R7.2 v1(2795,1508.94) ; C6.1 v1(2885,1424.88) ; D8.2@3245.67,460.67 v1(3245.67,519.33) ; v1(4230.66,867.82) J36.2@4289.32,867.82 ; v1(4230.66,1417.82) J34.2@4289.32,1417.82 ; v1(4230.66,1967.82) J26.2@4289.32,1967.82 ; v1(4230.66,2517.82) J15.2@4289.32,2517.82 ; v1(4230.66,3067.82) J30.2@4289.32,3067.82 ; v1(4230.66,4167.82) J22.2@4289.32,4167.82 ; v1(4230.66,4717.82) J19.2@4289.32,4717.82 ; v1(4230.66,5817.82) J28.2@4289.32,5817.82 ; v1(4503.94,1975) R1.2
  SIG TOP w20: U3.16 3425.29,1147.27 3425.29,1078.17 v1(3425.59,1077.87) C13.1 ; C12.2@3495.08,1077.87 3495.59,1077.36 C12.2@3495.59,1070.43 ; C12.2@3512.63,1079.49 v1(3512.63,1133.07) ; C11.1@3602.63,1085.37 C11.1 v1(3602.63,1138.95)
  SIG TOP w30: v1(3970,4015) 3970,3715 4067.18,3617.82 J24.2@4342.82,3617.82 ; J24.2 J24.2@4342.82,3617.82 ; J32.2 4414.35,5267.82 4435.07,5288.54 4435.07,5313.39 4435,5313.46 v1(4435,5430) ; J24.2@4345,3620 J24.2@4342.82,3617.82
5V_IO: J4.18 J7.1 R2.2 | length 64.6
  SIG TOP w15: v1(4503.95,2728) R2.2
CAN1_N: CR2.2 J8.2 R6.1 U1.6 | length 1131.4
  SIG TOP w5: J8.2 1209.06,439.46 1229,459.41 1229,507.84 1407.16,686 1585,686 1634.5,735.5 1634.5,793.5 1610,818 CR2.2 ; CR2.2@1607.71,820.29 1607.71,1003.7 1570,1041.41 1570,1111.3 1600.19,1141.5 1617.91,1141.5 1634.03,1157.61 1634.03,1176.35 1633.56,1176.81 1633.56,1206.52 U1.6
CAN1_P: CR1.2 J8.7 R4.2 U1.7 | length 1294.8
  SIG TOP w5: J8.7 1163.54,328.1 1188.1,328.1 1260,400 1260,495 1420,655 1597.84,655 1665.5,722.66 1665.5,793.57 1668.43,796.5 1668.5,796.5 1690,818 CR1.2 ; U1.7 1665.49,1206.52 1665.49,1176.81 1665.03,1176.35 1665.03,1157.61 1681.14,1141.5 R4.2 1698.86,1141.5 1730,1110.35 1730,1042.36 1691.34,1003.7 CR1.2@1691.34,819.34
CAN2_N: CR4.1 J9.2 R10.1 U2.6 | length 854.9
  SIG TOP w5: R10.1 2586.62,1143.7 2558.37,1115.45 2558.37,1044.88 2594.94,1008.31 2594.94,822.74 CR4.1 2595.47,820.2 2624,791.68 2624,460.56 2609.06,445.62 J9.2@2620,425 ; R10.1@2596.75,1143.7 2610,1156.95 U2.6
CAN2_P: CR3.1 J9.7 R8.2 U2.7 | length 1000.9
  SIG TOP w5: J9.7 2569.09,319.09 2655,405 2655,799.73 2675.47,820.2 2675.47,1008.72 2712.58,1045.83 2712.58,1115.45 2684.33,1143.7 R8.2 2673.25,1143.7 2660,1156.95 U2.7
EXT_3.3V: F2.1 J4.16 | length 67.5
  SIG TOP w50: v1(4500,4985) F2.1@4567.5,4985
EXT_5V: F1.1 J4.06 | length 67.5
  SIG TOP w50: v1(4500,5070) F1.1@4567.5,5070
EXT_7V-12V: F3.1 J4.24 | length 67.5
  SIG TOP w50: v1(4510,4230) F3.1@4577.5,4230
FDCAN1_RX: J4.57 U1.4 U5.1 | length 1899.4
  SIG TOP w7: J4.57 1300,2011.1 1300,1940 1330,1910 1390,1910 1575,1725 1575,1445 1574.53,1444.53 U1.4
  SIG TOP w15: v1@2115.68,1729.66 U5.1@2190.12,1729.66
  SIG4 w7: J4.57 1304.36,2006.74 1411.97,2006.74 1689.33,1729.38 2104.78,1729.38 2105,1729.61 v1@2105,1730
  SIG4 w15: v1@2105,1730 2114.79,1730 v1(2115.4,1729.38)
FDCAN1_TX: J4.55 U1.1 U4.1 | length 2590.8
  SIG TOP w7: J4.55 1301.1,2110 1380.96,2110 1411.88,2079.09 ; 1411.97,2078.99 1411.97,1968.03 1625.91,1754.09 1736.87,1754.09 1765,1725.96 1765,1501.47 1724.53,1460.99 U1.1
  SIG TOP w15: v1(2113.99,1568.11) U4.1@2187.97,1568.11
  SIG4 w7: J4.55 1303.59,2215 1629.73,2215 1800,2044.73 1800,1905 1925,1780 2132.36,1780 2174.71,1737.64 2174.71,1624.71 2118.11,1568.11 v1(2113.99,1568.11)
FDCAN2_RX: J5.29 U2.4 U7.1 | length 2994.2
  SIG TOP w7: U7.1 2409.79,1165.5 2431.69,1187.4 2432.4,1187.4 2480,1235 2480,1310 2515,1345 2550,1345 2560,1355 U2.4@2560,1381.56 ; U2.4 2560,1470 2490,1540 2490,2300.43 J5.29
FDCAN2_TX: J5.17 U2.1 U6.1 | length 4294
  SIG TOP w7: U6.1@2270,1330 2259.71,1330 2184.71,1255 2100,1255 2080,1235 2080,1185 2160,1105 2450,1105 2515,1170 2515,1265 2555,1305 2660,1305 2705,1350 2705.9,1350 2710,1354.1 U2.1 2710,1470 2771.5,1531.5 2771.5,2401.5 3580,3210 3675,3210 3700,3235 3700,4010.12 J5.17
GND: C1.2 C2.2 C3.1 C4.2 C5.2 C6.2 C7.1 C8.2 C9.1 C10.1 C11.2 C12.1 C13.2 CR1.1 CR2.1 CR3.2 CR4.2 D1.1 D2.1 J1.2 J2.2 J3.2 J4.08 J4.19 J4.20 J4.22 J4.49 J4.60 J5.09 J5.20 J5.39 J5.54 J5.63 J6.2 J7.2 J8.SHIELD J9.SHIELD J10.SHIELD J12.2 J13.2 J15.3 J16.2 J17.2 J19.3 J20.2 J22.3 J23.2 J24.3 J25.2 J26.3 J27.2 J28.3 J29.2 J30.3 J31.2 J32.3 J33.2 J34.3 J35.2 J36.3 MP1.1 MP2.1 MP3.1 MP4.1 R5.1 R9.1 U1.2 U2.2 U3.15 U4.3 U5.3 U6.3 U7.3 U8.3 U9.3 U10.3 U11.3 U12.3 U13.3 U14.3 U15.3 | length 4283
  SIG TOP w7: J17.2 v1(256.91,2369.46) ; J13.2 v1(256.91,3140.46) ; J27.2 661.91,2012.29 v1(761.98,2012.29) ; J31.2 v1(768.87,1453.35) ; J35.2 v1(768.87,2561.3) ; J12.2 v1(770.79,899.37) ; J33.2 v1(770.79,3115.28) ; J29.2 v1(774.64,3669.26) ; J23.2 v1(776.56,5885.17) ; J16.2 v1(782.34,4223.24) ; J25.2 v1(782.34,4777.21) ; J20.2 v1(782.34,5331.19) ; v1(1650,875) C1.2 ; v1(2635,880) C5.2
  SIG TOP w15: v1(1416.48,818.95) CR2.1@1486.05,818.95 ; C4.2 v1(1625,1645) ; v1(1674.6,1323.05) U1.2@1674.6,1392.62 ; C3.1 v1(1712.17,1689.09) ; v1(1810,1121.06) R5.1 ; CR1.1@1813.95,821.05 v1(1883.52,821.05) ; v1(1910,1186.25) C2.2 ; v1(2125,1203) U7.3 ; v1(2125,1365) U6.3 ; U10.3@2198.66,4584.26 2201.34,4584.26 v1(2263.23,4584.26) v1@2265,4586.03 ; U11.3@2198.66,4742.96 2201.34,4742.96 v1(2263.23,4742.96) v1@2265,4744.73 ; U5.3@2270.4,1691.79 2273.08,1691.79 v1(2334.97,1691.79) v1@2336.74,1693.56 ; U14.3@2272.44,2200 2275.94,2196.5 2343.5,2196.5 v1(2345,2195) ; U9.3@2273.66,1864.23 2276.34,1864.23 v1(2338.23,1864.23) v1@2340,1866 ; U8.3@2273.66,2023.27 2276.34,2023.27 v1(2338.23,2023.27) v1@2340,2025.04 ; U4.3@2277.37,1530 v1(2340,1530) ; U15.3@2278.35,2362.4 2281.02,2362.4 v1(2342.91,2362.4) ; v1(2404.45,821.15) CR4.2@2474.02,821.15 ; U2.2 2664.31,1416.56 2664.31,1467.83 2681.42,1484.94 C8.2 ; C7.1@2667.56,1635 C7.1 v1(2737.13,1635) ; C8.2@2692.62,1555 v1(2730,1555) ; v1(2795,1121.06) R9.1 ; CR3.2@2799.43,823.25 v1(2869,823.25) ; v1(2885,1186.13) C6.2 C6.2@2885,1255.7 ; U12.3@2913.27,4745 v1(2975,4745) ; U13.3@2917.11,4585 2918.11,4584 2974,4584 v1(2975,4585) ; v1(2992.65,1466.82) C10.1@3062.22,1466.82 ; U3.15@3375,1129.76 v1(3375,1220) ; v1(3425.59,902.87) C13.2 ; C9.1@3502.54,1207.5 v1(3572.11,1207.5) ; v1(3515.59,937.87) C12.1@3515.59,1002.44 ; v1(3602.63,913.19) C11.2@3602.63,977.75 ; v1(4230.66,946.56) J36.3@4289.32,946.56 ; v1(4230.66,1496.56) J34.3@4289.32,1496.56 ; v1(4230.66,2046.56) J26.3@4289.32,2046.56 ; v1(4230.66,2596.56) J15.3@4289.32,2596.56 ; v1(4230.66,3146.56) J30.3@4289.32,3146.56 ; v1(4230.66,3696.56) J24.3@4289.32,3696.56 ; v1(4230.66,4246.56) J22.3@4289.32,4246.56 ; v1(4230.66,4796.56) J19.3@4289.32,4796.56 ; v1(4230.66,5346.56) J32.3@4289.32,5346.56 ; v1(4230.66,5896.56) J28.3@4289.32,5896.56 ; D1.1 v1(4855.91,1975) ; D2.1 4793.35,2730 v1(4865,2730)
  other v2: 250,250 4750,250 250,6000 4750,6000
NetC1_1: C1.1 R4.1 R6.2 U1.5 | length 552.3
  SIG TOP w7: U1.5 1575,1216.03 1575,1270 1580,1275 1645.9,1275 1650,1270.9 v1(1650,1042.93) ; R6.2@1618.86,1078.5 R6.2 1613.64,1074.86 1613.64,1056.36 1627.07,1042.93 v1(1650,1042.93) ; C1.1 v1@1650,1038.5 ; R4.1@1681.14,1078.5 R4.1 1686.36,1074.86 1686.36,1056.36 1672.93,1042.93 v1(1650,1042.93)
NetC5_1: C5.1 R8.1 R10.2 U2.5 | length 556.8
  SIG TOP w7: U2.5 2560.47,1218.23 2560.47,1272.2 2565.47,1277.2 2631.37,1277.2 2635.47,1273.1 v1(2635.47,1045.13) ; R10.2 2599.12,1077.06 2599.12,1058.56 2612.54,1045.13 v1(2635.47,1045.13) ; C5.1@2635.47,998.62 v1(2635.47,1045.13) ; R8.1 2671.83,1077.06 2671.83,1058.56 2658.41,1045.13 v1(2635.47,1045.13)
  SIG TOP w15: R10.2 R10.2@2604.33,1080.71 ; R8.1@2666.62,1080.71 R8.1
NetC9_2: C9.2 U3.2 | length 185.4
  SIG TOP w15: U3.2 3375.85,1341.59 3375.85,1292.61 3389.17,1279.29 C9.2
NetC10_2: C10.2 U3.6 | length 143.7
  SIG TOP w15: C10.2 3132,1459.01 3175.59,1415.43 3175.59,1343.03 U3.6
NetC14_1: C14.1 U3.1 | length 134.5
  SIG TOP w15: U3.1 3425,1412.29 3435.8,1423.09 3435.8,1456.67 C14.1
NetC14_2: C14.2 U3.3 | length 160.3
  SIG TOP w15: U3.3 3325,1397.29 3340.59,1412.87 3365.38,1412.87 3374.17,1421.66 C14.2
NetC15_1: C15.1 U3.4 | length 130.4
  SIG TOP w15: U3.4 3275,1407.29 3287,1419.29 C15.1
NetC15_2: C15.2 U3.5 | length 136.6
  SIG TOP w15: C15.2 3206.09,1459.79 3215.59,1450.3 3215.59,1417.87 3225,1408.46 U3.5
NetD1_2: D1.2 R1.1 | length 77.2
  SIG TOP w25: R1.1 D1.2
NetD2_2: D2.2 R2.1 | length 77.2
  SIG TOP w25: R2.1 D2.2
NetD3_1: D3.1 R11.1 R12.1 | length 2025.6
  SIG TOP w15: v1(300,5025) D3.1@300,5083.66 ; R11.1 1939.65,4546.14 1939.65,4619.65 v1(1940,4620) 1939.65,4620.35 1939.65,4704.06 R12.1
  SIG4 w15: v1(300,5025) 705,4620 v1(1940,4620)
NetD4_1: D4.1 R13.1 R14.1 | length 3366.2
  SIG TOP w15: v1(298.96,4271.34) D4.1@298.96,4330.01 ; R14.1 R13.1@2642.72,4694.58
  SIG4 w15: v1@300,4271.34 300.67,4272.02 300.67,4348.76 185,4464.43 185,4740 250,4805 375,4805 667.88,4512.12 2527.14,4512.12 v1(2643.92,4628.9)
NetD5_1: D5.1 R15.1 R16.1 | length 3773.6
  SIG TOP w15: v1(233.4,3583.23) D5.1@295.99,3583.23 ; R15.1@2045.67,2175.89 v1(2045.67,2249.62) R16.1
  SIG4 w15: v1(233.4,3583.23) 130.77,3685.85 130.77,3988.13 177.64,4035 330,4035 627.73,3737.27 627.73,3672.27 1155,3145 1155,2455 1196.26,2413.74 1881.55,2413.74 v1(2045.67,2249.62)
NetD6_1: D6.1 R17.1 R18.1 | length 2609.5
  SIG TOP w15: D6.1@364.29,466.34 v1(364.29,525.01) ; R18.1@2045.65,1654.14 R18.1 2049.59,1580.29 R17.1@2049.59,1508.22
  SIG4 w15: v1(364.29,525.01) 364.29,529.06 375,539.77 375,541.21 383.79,550 1490,550 2048.7,1108.7 v1(2048.7,1580.29)
NetD7_1: D7.1 R19.1 R20.1 | length 1292.7
  SIG TOP w7: D7.1@1762.99,459.33 D7.1
  SIG TOP w15: D7.1@1763.62,460.67 v1(1763.62,519.34) ; R20.1@2412.15,1260.55 2412.15,1335.22 R19.1
  SIG4 w15: v1(1763.62,519.34) 2411.46,1167.17 v1(2411.46,1335.22)
NetD8_1: D8.1 R21.1 R22.1 | length 2482.6
  SIG TOP w15: R22.1 R21.1 ; D8.1@3166.26,461.34 v1(3166.26,520)
  SIG4 w15: v1(2006.73,1903.01) 2006.73,1858.18 2029.42,1835.49 2144.44,1835.49 2204.93,1775 2375,1775 2414.4,1735.6 2414.4,1433.98 2500,1348.38 2500,790 2610,680 3006.26,680 v1(3166.26,520)
NetF1_2: F1.2 J1.1 | length 627.4
  SIG TOP w50: J1.1 4769.29,5429.05 4769.29,5099.29 4740,5070 F1.2@4652.5,5070
NetF2_2: F2.2 J2.1 | length 400.8
  SIG TOP w50: J2.1 4735.71,4777.34 4765,4806.63 4765,4955.71 4735.71,4985 F2.2@4652.5,4985
NetF3_2: F3.2 J3.1 | length 426.8
  SIG TOP w50: J3.1 4745.71,4006.34 4775,4035.63 4775,4200.71 4745.71,4230 F3.2@4662.5,4230
NetJ10_2: J10.2 U3.14 | length 1166.9
  SIG TOP w7: U3.14 3325,895 3555,665 3840,665 4009.06,495.94 J10.2
NetJ10_3: J10.3 U3.13 | length 1133.7
  SIG TOP w7: U3.13 3275,865 3560,580 3830,580 3900,510 J10.3
NetR3_1: R3.1 R5.2 U1.8 | length 265.1
  SIG TOP w7: U1.8 1724.53,1294.53 1747.32,1317.32 1810,1317.32 ; R5.2 1810,1317.32 ; R3.1 1810,1317.32
NetR7_1: R7.1 R9.2 U2.8 | length 265.1
  SIG TOP w7: U2.8@2709.53,1215.55 2709.53,1294.53 2732.32,1317.32 2795,1317.32 ; R9.2 2795,1317.32 ; R7.1 2795,1317.32
NetR11_2: R11.2 U10.2 | length 119
  SIG TOP w7: R11.2 R11.2@2003.16,4546.66 ; U10.2@2113.03,4546.66 2115.79,4549.42 2118.54,4546.66 U10.2@2118.66,4546.66
  SIG TOP w15: R11.2@2003.16,4546.66 U10.2@2113.03,4546.66
NetR12_2: R12.2 U11.2 | length 116.8
  SIG TOP w7: R12.2 R12.2@2003.23,4705.36
  SIG TOP w15: R12.2@2003.23,4705.36 U11.2@2118.66,4705.36
NetR13_2: R13.2 U12.2 | length 123.4
  SIG TOP w15: R13.2 2706.82,4705.52 U12.2@2828.71,4705.52
NetR14_2: R14.2 U13.2 | length 134
  SIG TOP w15: R14.2 2705.72,4553.25 2713.96,4545 U13.2@2830.15,4545
NetR15_2: R15.2 U14.2 | length 90.8
  SIG TOP w15: R15.2 U14.2@2198.82,2160.27
NetR16_2: R16.2 U15.2 | length 90.3
  SIG TOP w7: R16.2 R16.2@2110.12,2324.8
  SIG TOP w15: R16.2@2110.12,2324.8 U15.2@2198.35,2324.8
NetR17_2: R17.2 U4.2 | length 79.3
  SIG TOP w7: 2176.4,1493.39 U4.2@2189.39,1493.39
  SIG TOP w15: R17.2 2114.89,1493.39 2176.4,1493.39
NetR18_2: R18.2 U5.2 | length 77.8
  SIG TOP w7: R18.2 R18.2@2112.63,1654.19
  SIG TOP w15: R18.2@2112.63,1654.19 U5.2@2190.4,1654.19
NetR19_2: R19.2 U6.2 | length 79.1
  SIG TOP w7: R19.2@2346.08,1406.3 R19.2
  SIG TOP w15: U6.2@2271.34,1406.3 R19.2@2346.08,1406.3
NetR20_2: R20.2 U7.2 | length 78.7
  SIG TOP w7: R20.2@2346.45,1242.05 R20.2
  SIG TOP w15: U7.2@2273.84,1240 R20.2@2349.61,1240
NetR21_2: R21.2 U8.2 | length 122.2
  SIG TOP w7: R21.2 R21.2@2071.64,1985.67
  SIG TOP w15: R21.2@2071.64,1985.67 U8.2@2193.66,1985.67
NetR22_2: R22.2 U9.2 | length 123.2
  SIG TOP w7: R22.2 R22.2@2074.1,1826.63
  SIG TOP w15: R22.2@2074.1,1826.63 U9.2@2193.66,1826.63
PA0: J4.28 J28.1 | length 3895
  SIG TOP w7: J4.28 3528.59,5740 J28.1@4342.42,5740
PA2: J5.35 J15.1 | length 1176.8
  SIG TOP w7: J5.35 3649.84,3155.16 3650,3155 3655.12,3155 3700.12,3110 3795,3110 3877.95,3027.05 3877.95,2735.88 4173.83,2440 J15.1@4354.77,2440
PA3: J5.37 J26.1 | length 1763
  SIG TOP w7: J5.37 3649.84,3059.84 3645,3055 3655.12,3055 3700,3010.12 3700,2045 3733.37,2011.63 3803.37,2011.63 3930,1885 J26.1@4350.76,1885
PA4: J4.32 J13.1 | length 1337.1
  SIG TOP w7: J13.1 256.91,3061.71 391.72,3061.71 680,3350 1125,3350 1160,3315 1303.59,3315 J4.32
PA5: J5.11 J17.1 | length 4490.5
  SIG TOP w7: J17.1 256.91,2290.72 675.72,2290.72 1095,2710 1440,2710 1795.72,3065.72 1795.72,3320.39 2835.6,4360.27 J5.11
PA6: J5.13 J19.1 | length 974.6
  SIG TOP w7: J5.13 3699.57,4310 3837.11,4310 3877.95,4350.85 3877.95,4557.95 3960,4640 J19.1@4345.86,4640
PA7: J5.15 J22.1 | length 728.8
  SIG TOP w7: J5.15 3700.12,4110 4198.66,4110 4218.66,4090 J22.1@4349.49,4090
PB1: J5.24 J24.1 | length 689
  SIG TOP w7: J5.24 3970.12,3540 J24.1@4347.6,3540
PC4: J5.34 J30.1 | length 732.3
  SIG TOP w7: J5.34 3749.84,3260.16 3760,3250 3760.12,3250 4020.12,2990 J30.1@4370.11,2990
PC5: J5.06 J32.1 | length 999
  SIG TOP w7: J5.06 3900,4810.43 3900,5125 3965,5190 J32.1@4345.14,5190
PD10: J5.65 J12.1 | length 4102.3
  SIG TOP w7: J12.1 J12.1@682.63,820.63 ; J12.1@691.5,811.76 J12.1@682.63,820.63 ; v1(770.79,820.63) J12.1@682.63,820.63
  SIG BOT w7: v1(770.79,820.63) 970.72,620.7 3540.7,620.7 3700.82,780.82 3700.82,1609.29 J5.65
PD11: J5.45 J16.1 | length 3825.7
  SIG TOP w7: J16.1 v1(782.34,4144.5)
  SIG BOT w7: v1(782.34,4144.5) 782.34,3745.98 1213.31,3315 2880,3315 3534.73,2660.27 J5.45
PD12: J5.43 J20.1 | length 4281.2
  SIG TOP w7: J20.1 v1(782.34,5252.45)
  SIG BOT w7: v1(782.34,5252.45) 782.34,4999.13 971.46,4810 1810,4810 2030,4590 2030,4380 3620,2790 3620.12,2790 J5.43
PD14: J5.46 J23.1 | length 4812.7
  SIG TOP w7: J23.1 v1(776.56,5806.43)
  SIG BOT w7: v1(776.56,5806.43) 1263.57,5806.43 3558.45,3511.55 3558.45,2958.85 3602.34,2914.95 3670.05,2914.95 3700,2885 3700,2710.12 J5.46
PD15: J5.48 J25.1 | length 4197.2
  SIG TOP w7: J25.1 v1(782.34,4698.47)
  SIG BOT w7: v1(782.34,4698.47) 782.34,4373.91 1052.5,4103.75 1626.25,4103.75 2105,3625 2700,3625 3615,2710 3675,2710 3699.69,2685.31 3699.69,2610.42 J5.48
PE11: J5.56 J27.1 | length 3460.9
  SIG TOP w7: J27.1 v1(766.94,1928.59)
  SIG BOT w7: v1(766.94,1928.59) 766.94,1961.94 1215,2410 1434.26,2410 1459.26,2435 1975,2435 2005,2465 2263.43,2465 2293.43,2435 3395.23,2435 3620.23,2210 3700.12,2210 J5.56
PE12: J5.49 J29.1 | length 3676.1
  SIG TOP w7: J29.1 v1(774.64,3590.52)
  SIG BOT w7: v1(774.64,3590.52) 774.64,3210.36 1170,2815 3295.12,2815 J5.49
PE13: J5.55 J31.1 | length 3316.4
  SIG TOP w7: J31.1 v1(768.87,1374.61)
  SIG BOT w7: v1(768.87,1374.61) 1204.26,1810 1714.83,1810 2065.11,2160.27 J5.55
PE14: J5.51 J33.1 | length 3353.5
  SIG TOP w7: J33.1 v1(770.79,3036.54)
  SIG BOT w7: v1(770.79,3036.54) 770.79,2892.56 1048.35,2615 3395.12,2615 J5.51
PE15: J5.53 J35.1 | length 3105.8
  SIG TOP w7: J35.1 v1(768.87,2482.56)
  SIG BOT w7: v1(768.87,2482.56) 796.3,2510 3400.12,2510 J5.53
PF11: J5.62 J34.1 | length 904.7
  SIG TOP w7: J5.62 3905,1705.12 3905,1545 4110,1340 J34.1@4345.21,1340
PF12: J5.59 J36.1 | length 1584.1
  SIG TOP w7: J5.59 3700.82,1909.29 3700.82,1255.79 4166.61,790 J36.1@4366.4,790
UART4_RX: J4.02 J14.1 U11.1 | length 2249.1
  SIG TOP w7: J14.1 v1(256.91,5374.71)
  SIG TOP w15: v1(2050,4780) 2050.28,4780.28 2124.72,4780.28 U11.1@2125,4780
  SIG4 w7: v1(256.91,5374.71) 821.63,4810 1300,4810 1349.84,4859.84 J4.02 1358.74,4861.26 1380,4840 1990,4840 v1(2050,4780)
UART4_TX: J4.01 J14.2 U10.1 | length 2520.9
  SIG TOP w7: J14.2 v1(256.91,5453.45)
  SIG TOP w15: v1(2051.78,4623.22) 2117.3,4623.22 U10.1@2118.66,4621.86
  SIG4 w7: v1(256.91,5453.45) 316.55,5453.45 908.74,4861.26 J4.01 1293.57,4904.99 2025.01,4904.99 2097.62,4832.38 2097.62,4669.05 v1(2051.78,4623.22)
UART5_RX: J5.16 U3.12 U9.1 | length 5324.5
  SIG TOP w7: U3.12 v1(3225,1225)
  SIG TOP w15: v1@2118.94,1902.11 U9.1@2193.38,1902.11
  SIG4 w7: v1@2121.39,1902.11 2121.67,1901.83 2671.79,1901.83 3225,1348.62 v1(3225,1225) 3295.35,1225 3383.25,1312.9 3777.9,1312.9 3947.49,1482.49 3947.49,3134.54 3877.04,3205 3735,3205 3700,3240 3700,4105 3749.84,4154.84 J5.16
  SIG4 w15: v1(2118.66,1901.83) 2121.11,1901.83 v1@2121.39,1902.11
UART5_TX: J5.30 U3.11 U8.1 | length 5004.5
  SIG TOP w7: U3.11 v1(3175,1225)
  SIG TOP w15: v1@2118.94,2061.15 U8.1@2193.38,2061.15
  SIG4 w7: v1(2118.66,2060.87) 2060,2002.21 2060,1890 2085,1865 2180.29,1865 2181.06,1864.23 2205.77,1864.23 2240,1830 2370,1830 2475,1725 2475,1484.78 2734.78,1225 v1(3175,1225) 3234.83,1165.17 3375,1165.17 3452.7,1242.87 3737.87,1242.87 3847.87,1242.87 4015,1410 4015,3195.12 J5.30
UART7_RX: J5.44 J21.1 U13.1 | length 7742
  SIG TOP w7: 165.79,4603.71 v1(256.91,4603.71)
  SIG TOP w15: v1(2755,4620) U13.1@2836.33,4620
  SIG4 w7: v1(256.91,4603.71) 1140.23,3720.39 1384.61,3720.39 2297.8,2807.2 3702.91,2807.2 J5.44 3825,2835.43 3825,3060.9 3780.9,3105 3562.55,3105 3558.45,3109.1 3558.45,4650.46 3393.9,4815 2720,4815 2675,4770 2675,4700 v1(2755,4620)
UART7_TX: J5.40 J21.2 U12.1 | length 7010.3
  SIG TOP w7: 165.79,4682.45 v1(256.91,4682.45)
  SIG TOP w15: v1@2754.27,4780.72 U12.1@2828.71,4780.72
  SIG4 w7: v1(256.91,4682.45) 377.55,4682.45 1157.88,3902.12 1412.88,3902.12 2400,2915 3704.57,2915 J5.40 3700.12,3010 3577.05,3010 3455,3132.05 3455,4585 3259.56,4780.44 v1(2753.99,4780.44)
UART9_RX: J4.59 J18.1 U15.1 | length 3690.2
  SIG TOP w7: J18.1@166.96,3886.26 v1(255,3886.26)
  SIG TOP w15: v1@2123.63,2400.28 U15.1@2198.07,2400.28
  SIG4 w7: v1(255,3886.26) 978.13,3163.13 978.13,2173.13 1190,1961.26 J4.59
  SIG BOT w7: J4.59 1251.26,1961.26 1297.95,2007.95 1297.95,2179.18 1333.77,2215 1425,2215 1560,2350 2073.35,2350 v1(2123.35,2400)
UART9_TX: J4.58 J18.2 U14.1 | length 3540.4
  SIG TOP w7: J18.2@170.61,3965 v1(255,3965)
  SIG TOP w15: v1(2110,2230) 2112.75,2232.75 2198.52,2232.75 U14.1@2204.77,2239
  SIG4 w7: v1(255,3965) 1040,3180 1040,2220 1150,2110 1301.1,2110 J4.58
  SIG BOT w7: J4.58 1396.26,2061.26 1637.68,2302.68 2073.23,2302.68 2110.6,2265.32 2110.6,2230.6 v1(2110,2230)
pads on no net: J4.03 J4.04 J4.07 J4.09 J4.10 J4.11 J4.12 J4.13 J4.14 J4.15 J4.17 J4.21 J4.23 J4.25 J4.26 J4.27 J4.29 J4.30 J4.31 J4.33 J4.34 J4.35 J4.36 J4.37 J4.38 J4.39 J4.40 J4.41 J4.42 J4.43 J4.44 J4.45 J4.46 J4.47 J4.48 J4.50 J4.51 J4.52 J4.53 J4.54 J4.56 J4.61 J4.62 J4.63 J4.64 J4.65 J4.66 J4.67 J4.68 J4.69 J4.70 J5.01 J5.02 J5.03 J5.04 J5.05 J5.07 J5.08 J5.10 J5.12 J5.14 J5.18 J5.19 J5.21 J5.22 J5.23 J5.25 J5.26 J5.27 J5.28 J5.31 J5.32 J5.33 J5.36 J5.38 J5.41 J5.42 J5.47 J5.50 J5.52 J5.57 J5.58 J5.60 J5.61 J5.64 J5.66 J5.67 J5.68 J5.69 J5.70 J8.1 J8.3 J8.4 J8.5 J8.6 J8.8 J8.9 J9.1 J9.3 J9.4 J9.5 J9.6 J9.8 J9.9 J10.1 J10.4 J10.5 J10.6 J10.7 J10.8 J10.9 J12.3 J12.4 J13.3 J13.4 J14.3 J14.4 J15.4 J15.5 J16.3 J16.4 J17.3 J17.4 J18.3 J18.4 J19.4 J19.5 J20.3 J20.4 J21.3 J21.4 J22.4 J22.5 J23.3 J23.4 J24.4 J24.5 J25.3 J25.4 J26.4 J26.5 J27.3 J27.4 J28.4 J28.5 J29.3 J29.4 J30.4 J30.5 J31.3 J31.4 J32.4 J32.5 J33.3 J33.4 J34.4 J34.5 J35.3 J35.4 J36.4 J36.5 U3.7 U3.8 U3.9 U3.10
copper on no net:
  other v1: 2180,130 4310,130 645,135 1349.93,134.94 2825,135 3595,140 120,565 4595,660 490,700 4855,725 1217.58,741.76 2255,750 3180,765 2085,970 2970,990 1225,1075 4750,1395 3290,1685 4530,1775 520,1785 95,1855 1115,1855 2940,1935 1805,2210 3005,2280 155,2630 430,2770 1855,2970 2600,3115 1530,3140 3230,3505 2455,4240 1125,4420 3175,4580 3120,4965 2390,4985 1280,5285 3691.26,5482.6 2290,5560 1551.35,6013.86 3250,6045

## Polygon pours and split planes (outlines as drawn)
GND on GND2 (split plane): 4979.9,20.1 20.1,20.1 20.1,6229.9 4979.9,6229.9
3.3V_IO on PWR3 (split plane): 4979.9,20.1 20.1,20.1 20.1,6229.9 4979.9,6229.9
5V_IO on PWR3 (split plane): 1284.93,4110 1285.22,4107.06 1286.07,4104.23 1287.47,4101.63 1289.34,4099.34 1291.63,4097.47 1294.23,4096.07 1297.06,4095.22 1300,4094.93 1512.42,4094.93 1512.42,3925.07 1340,3925.07 1337.06,3924.78 1334.23,3923.93 1331.63,3922.53 1329.34,3920.66 1289.34,3880.66 1287.47,3878.37 1286.07,3875.77 1285.22,3872.94 1284.93,3870 1284.93,3710 1285.22,3707.06 1286.07,3704.23 1287.47,3701.63 1289.34,3699.34 1291.63,3697.47 1293.11,3696.68 1340.44,3649.34 1342.73,3647.47 1345.33,3646.07 1348.16,3645.22 1351.1,3644.93 4798.43,3644.93 4798.43,2751.64 4658.78,2611.99 4509.33,2611.99 4437.57,2683.75 4437.57,3222.51 4437.28,3225.45 4436.42,3228.27 4435.03,3230.88 4433.15,3233.16 4340.66,3325.66 4338.37,3327.53 4335.77,3328.93 4332.94,3329.78 4330,3330.07 1219.56,3330.07 1105.07,3444.56 1105.07,3750 1105.07,4257.75 1199.27,4351.95 1284.93,4351.95
EXT_7V-12V on PWR3 (split plane): 4799.93,4233.76 4799.93,3676.33 4355.92,3676.33 4352.98,3676.04 4350.15,3675.18 4349.95,3675.07 1357.34,3675.07 1315.07,3717.34 1315.07,3863.76 1346.24,3894.93 4125,3894.93 4127.94,3895.22 4130.77,3896.07 4133.37,3897.47 4135.66,3899.34 4531.24,4294.93 4738.76,4294.93
EXT_5V on PWR3 (split plane): 4608,5301.69 4608,5042.79 4385.11,5042.79 4272.37,5155.53 4272.29,5155.77 4270.9,5158.37 4269.03,5160.66 4266.74,5162.53 4264.14,5163.93 4261.31,5164.78 4258.37,5165.07 2225,5165.07 2222.06,5164.78 2219.23,5163.93 2216.63,5162.53 2214.34,5160.66 1580.88,4527.19 1344.12,4527.19 1315.07,4556.24 1315.07,4561.26 1315.07,4743.83 1583.9,4743.83 1586.84,4744.12 1589.67,4744.98 1592.28,4746.37 1594.56,4748.24 2178.57,5332.25 4577.44,5332.25
EXT_3.3V on PWR3 (split plane): 4608,4644.32 4088.76,4125.07 1315.07,4125.07 1315.07,4351.78 4001.01,4351.78 4003.95,4352.07 4006.78,4352.93 4009.39,4354.32 4011.67,4356.2 4389.52,4734.05 4391.4,4736.33 4392.79,4738.94 4393.65,4741.77 4393.94,4744.71 4393.94,5012.65 4608,5012.65
GND on GND5 (split plane): 4979.9,20.1 20.1,20.1 20.1,6229.9 4979.9,6229.9

## Other copper
PWR3 (plane layer: these items are gaps in the copper):
  lines w30: 1399.69,4110 4095,4110 4623.08,4638.08 4623.08,5042.5 ; 1444.73,4366.86 1444.56,4367.02 1193.03,4367.02 1090,4264 1090,3750 1090,3438.31 1213.31,3315 4330,3315 4422.49,3222.51 4422.49,2677.51 4503.08,2596.92 4665.02,2596.92 4813.5,2745.39 4813.5,3661.26 4355.92,3661.26 ; 1527.49,3910 1527.49,4107.49 1530,4110 1300,4110 1300,4366.86 1338.14,4366.86 4001.01,4366.86 4378.86,4744.71 4378.86,5027.72 ; 4258.37,5150 4256.58,5150 ; 4575.91,1904.09 4576.02,1903.98 ; 4256.58,5150 2225,5150 1587.12,4512.12 1337.88,4512.12 1300,4550 1300,4561.26 1300,4758.9 1583.9,4758.9 2172.33,5347.33 4583.68,5347.33 4623.08,5307.93 4623.08,5027.72 4378.86,5027.72 ; 4256.58,5150 4378.86,5027.72 ; 1300,3710 1301.1,3710 1351.1,3660 4815,3660 4815,4240 4745,4310 4727.96,4310 4525,4310 4125,3910 3335,3910 1690,3910 1430,3910 1340,3910 1300,3870 1300,3710

## Silkscreen, mask and mechanical layers (free items; w line width, h text height)
Top Overlay:
  drawing of 34 lines, arcs and shapes, not listed
  text "DIGITAL" at 685,6115 h60
  text "ANALOG" at 4040,6115 h60
  text "PWR IN" at 4550,5720 h60
  text "UART" at 215,5705 h60
  text "3.3V" at 4570,5145 h60
  text "5.0V" at 4575,4375 h60
  text "7V-12V" at 4505,3600 h60
  text "PWR OUT" at 4495,3405 h60
  text "DAC" at 235,3380 h60
  text "5.0V" at 4575,2830 h60
  text "3.3V" at 4575,2060 h60
  text "TRITON AI" at 130,1030 h60 r90
  text "UCSD evGoKart" at 225,1030 h60 r90
  text "Real Time Controller" at 325,1030 h60 r90
  text "Breakout Board" at 415,1030 h60 r90
  text "V3.0" at 505,1030 h60 r90
  text "RS232" at 3265,130 h40 r90
  text "CAN BUS 1" at 465,90 h40 r90
  text "CAN BUS 2" at 1865,75 h40 r90
Mechanical 1:
  circle w10: c2500,3486.1 r81.9
  lines w3.94: 3144.43,1113.26 ccw(c3144.43,1148.7) 3179.87,1148.7 ; 3144.43,1113.26 ccw(c3144.43,1113.26) 3144.43,1113.26 ; 3144.43,1113.26 3144.43,861.3 3799.21,861.3 ; 3179.87,1148.7 ccw(c3144.43,1148.7) 3144.43,1184.13 2593.25,1184.13 ccw(c2593.25,1148.7) 2557.82,1148.7 ccw(c2593.25,1148.7) 2593.25,1113.26 2593.25,861.3 1200.79,861.3 cw(c1200.79,940.04) 1122.05,940.04 1122.05,6032.17 cw(c1200.79,6032.17) 1200.79,6110.91 3799.21,6110.91 cw(c3799.21,6032.17) 3877.95,6032.17 3877.95,940.04 cw(c3799.21,940.04) 3799.21,861.3 ; 3179.87,1148.7 3179.87,1148.7 ; 3799.21,861.3 3799.21,861.3
  lines w10: 1122.05,3486.1 3877.95,3486.1 ; 1200.79,861.3 3799.21,861.3 ; 1200.79,6110.91 3799.21,6110.91 ; 2500,861.3 2500,6110.91